# Altium PCB ESE516_BareBoardTemplate.PcbDoc (part 1 of 2)
Units mil, origin at the board's own origin, x right, y up, seen from the top; angles counter-clockwise.
Board outline 2362.21 x 2362.21 mil, 4 copper layers (Top Layer, GroundPlane, PowerPlane, Bottom Layer), stack 58.4 mil thick; 99 components, 72 nets, 333 pads, 111 vias.
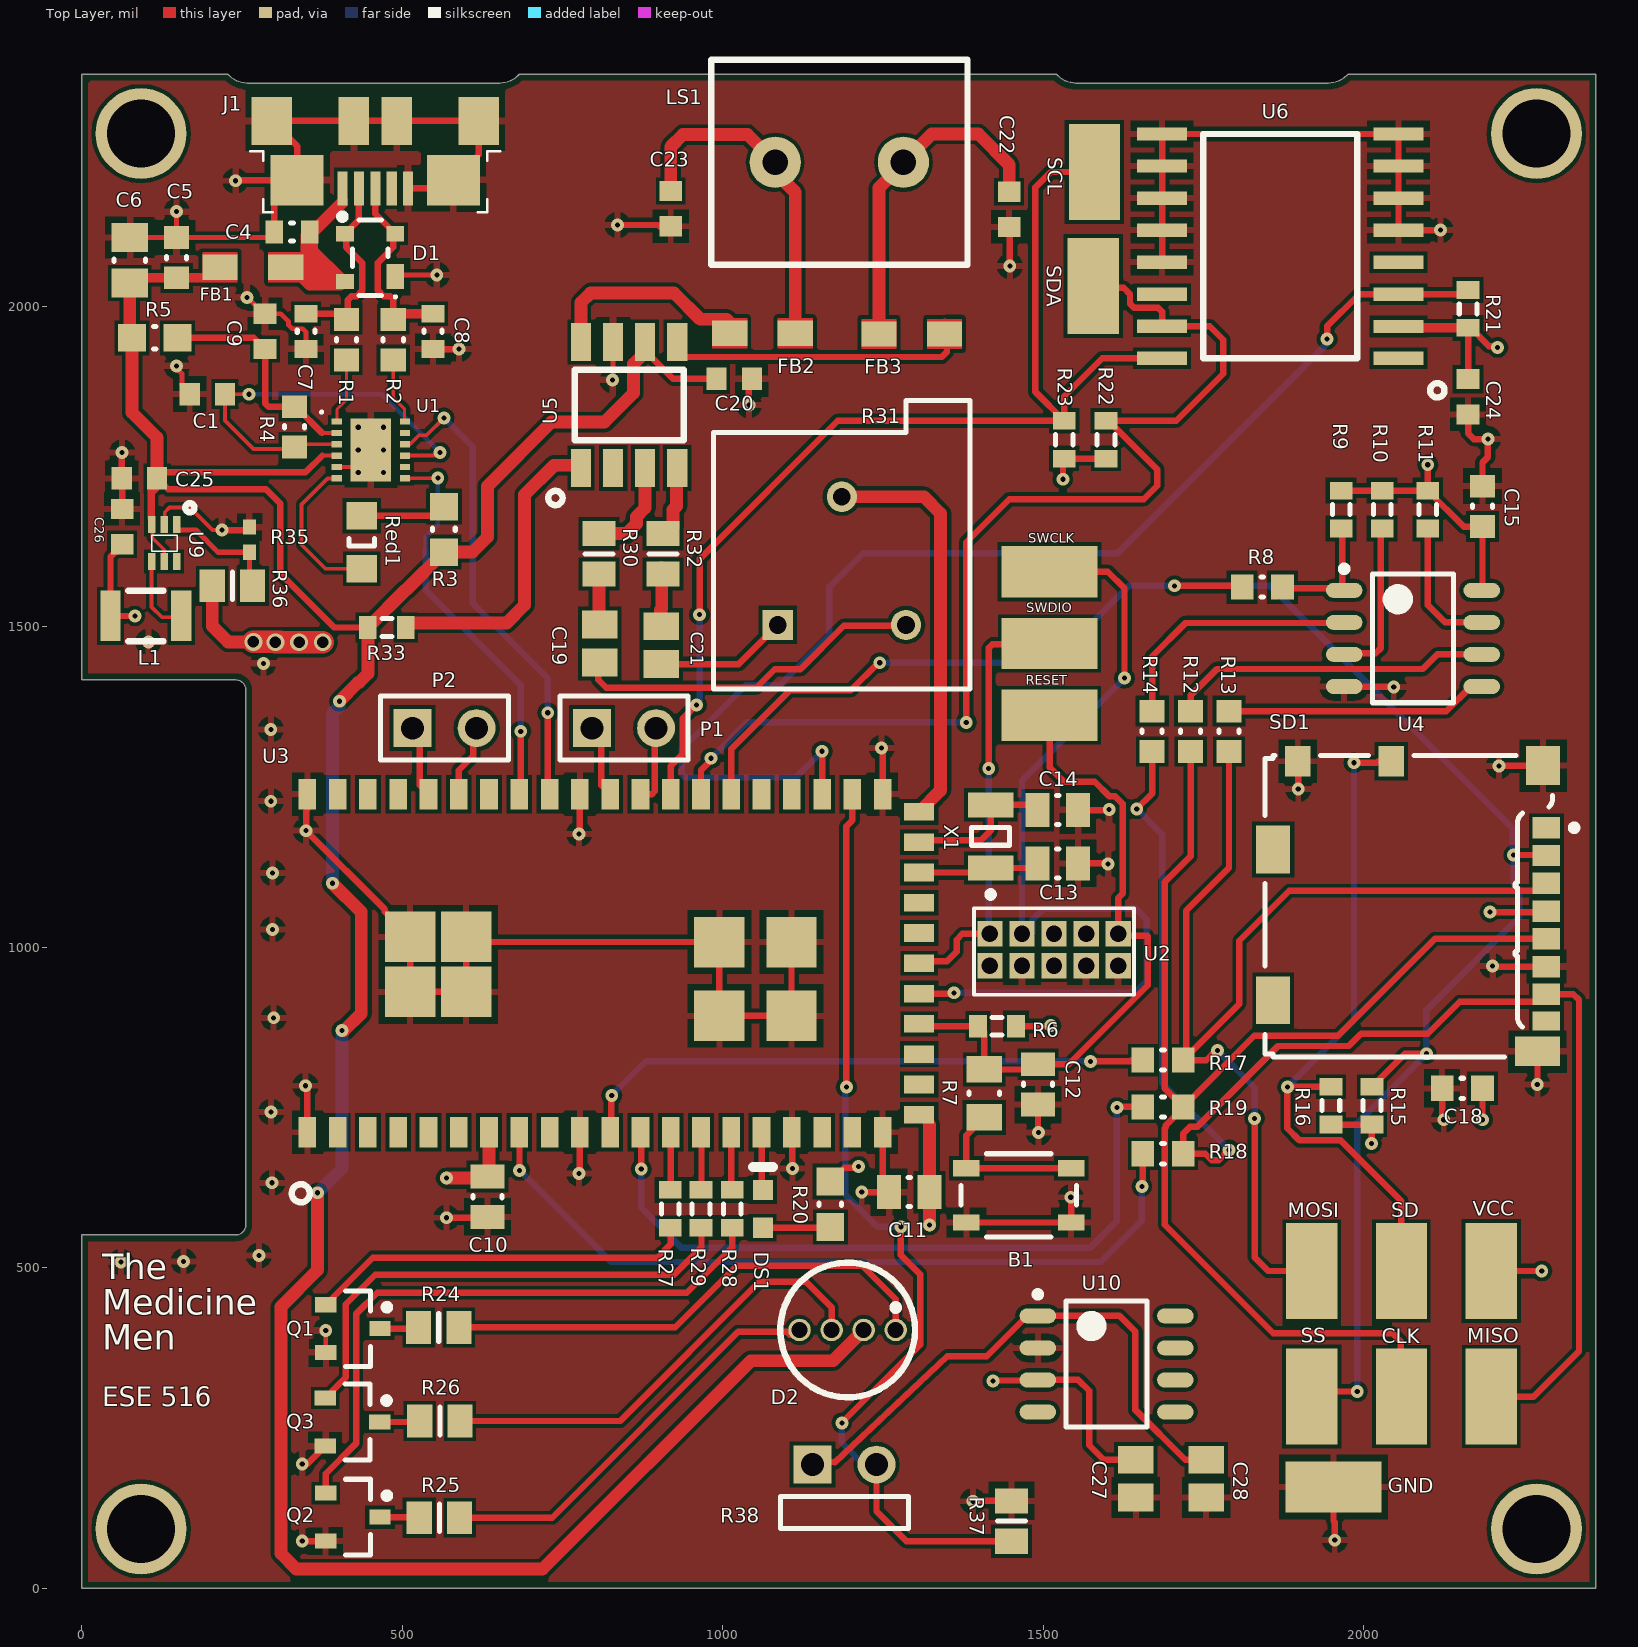
[diagram p0: Top Layer view]
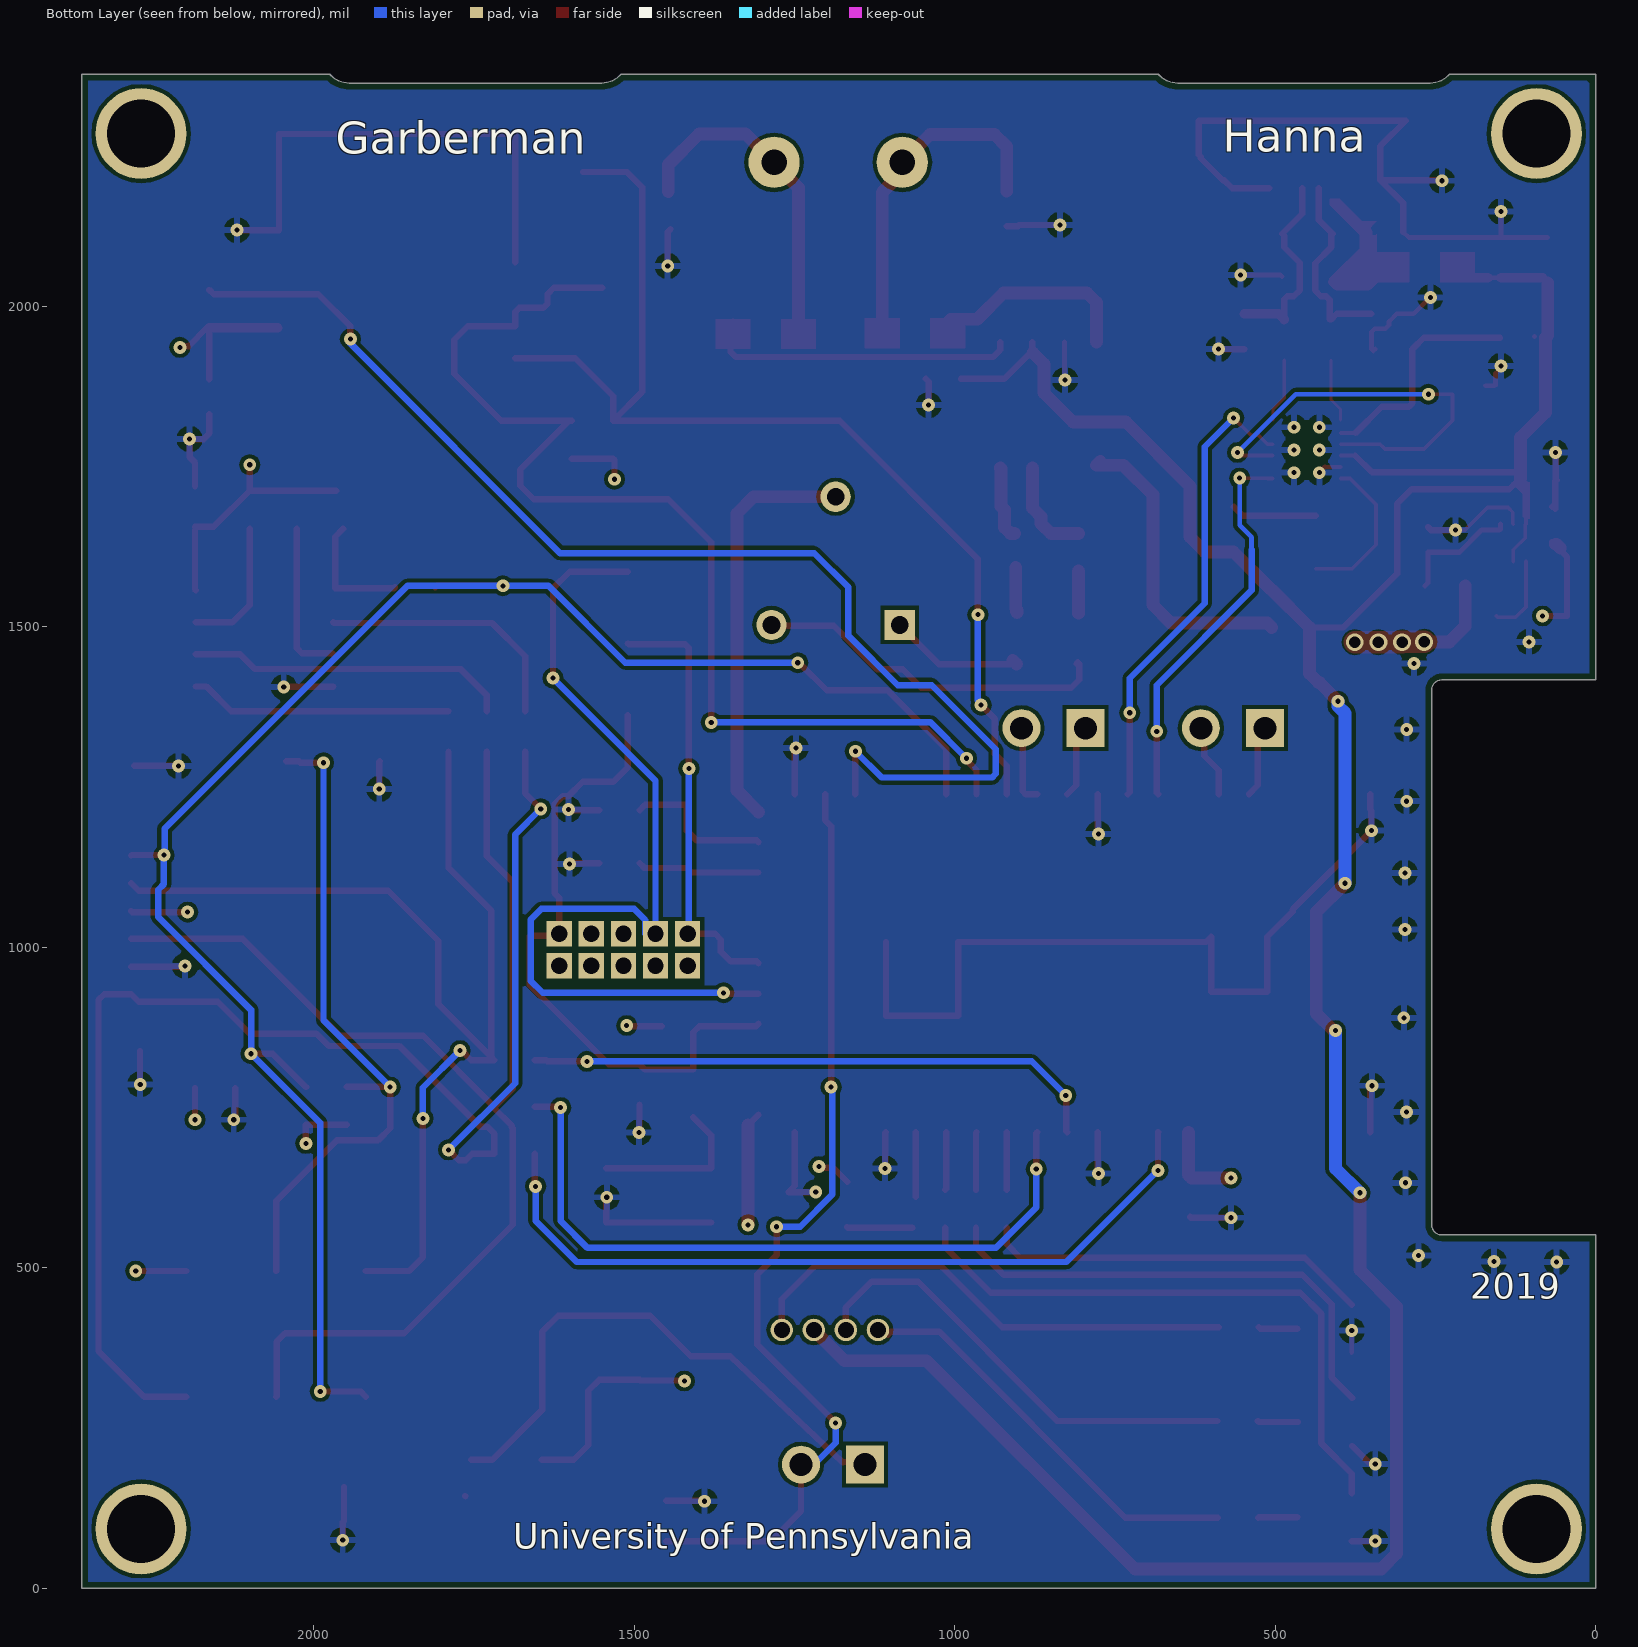
[diagram p1: Bottom Layer view, seen from below]
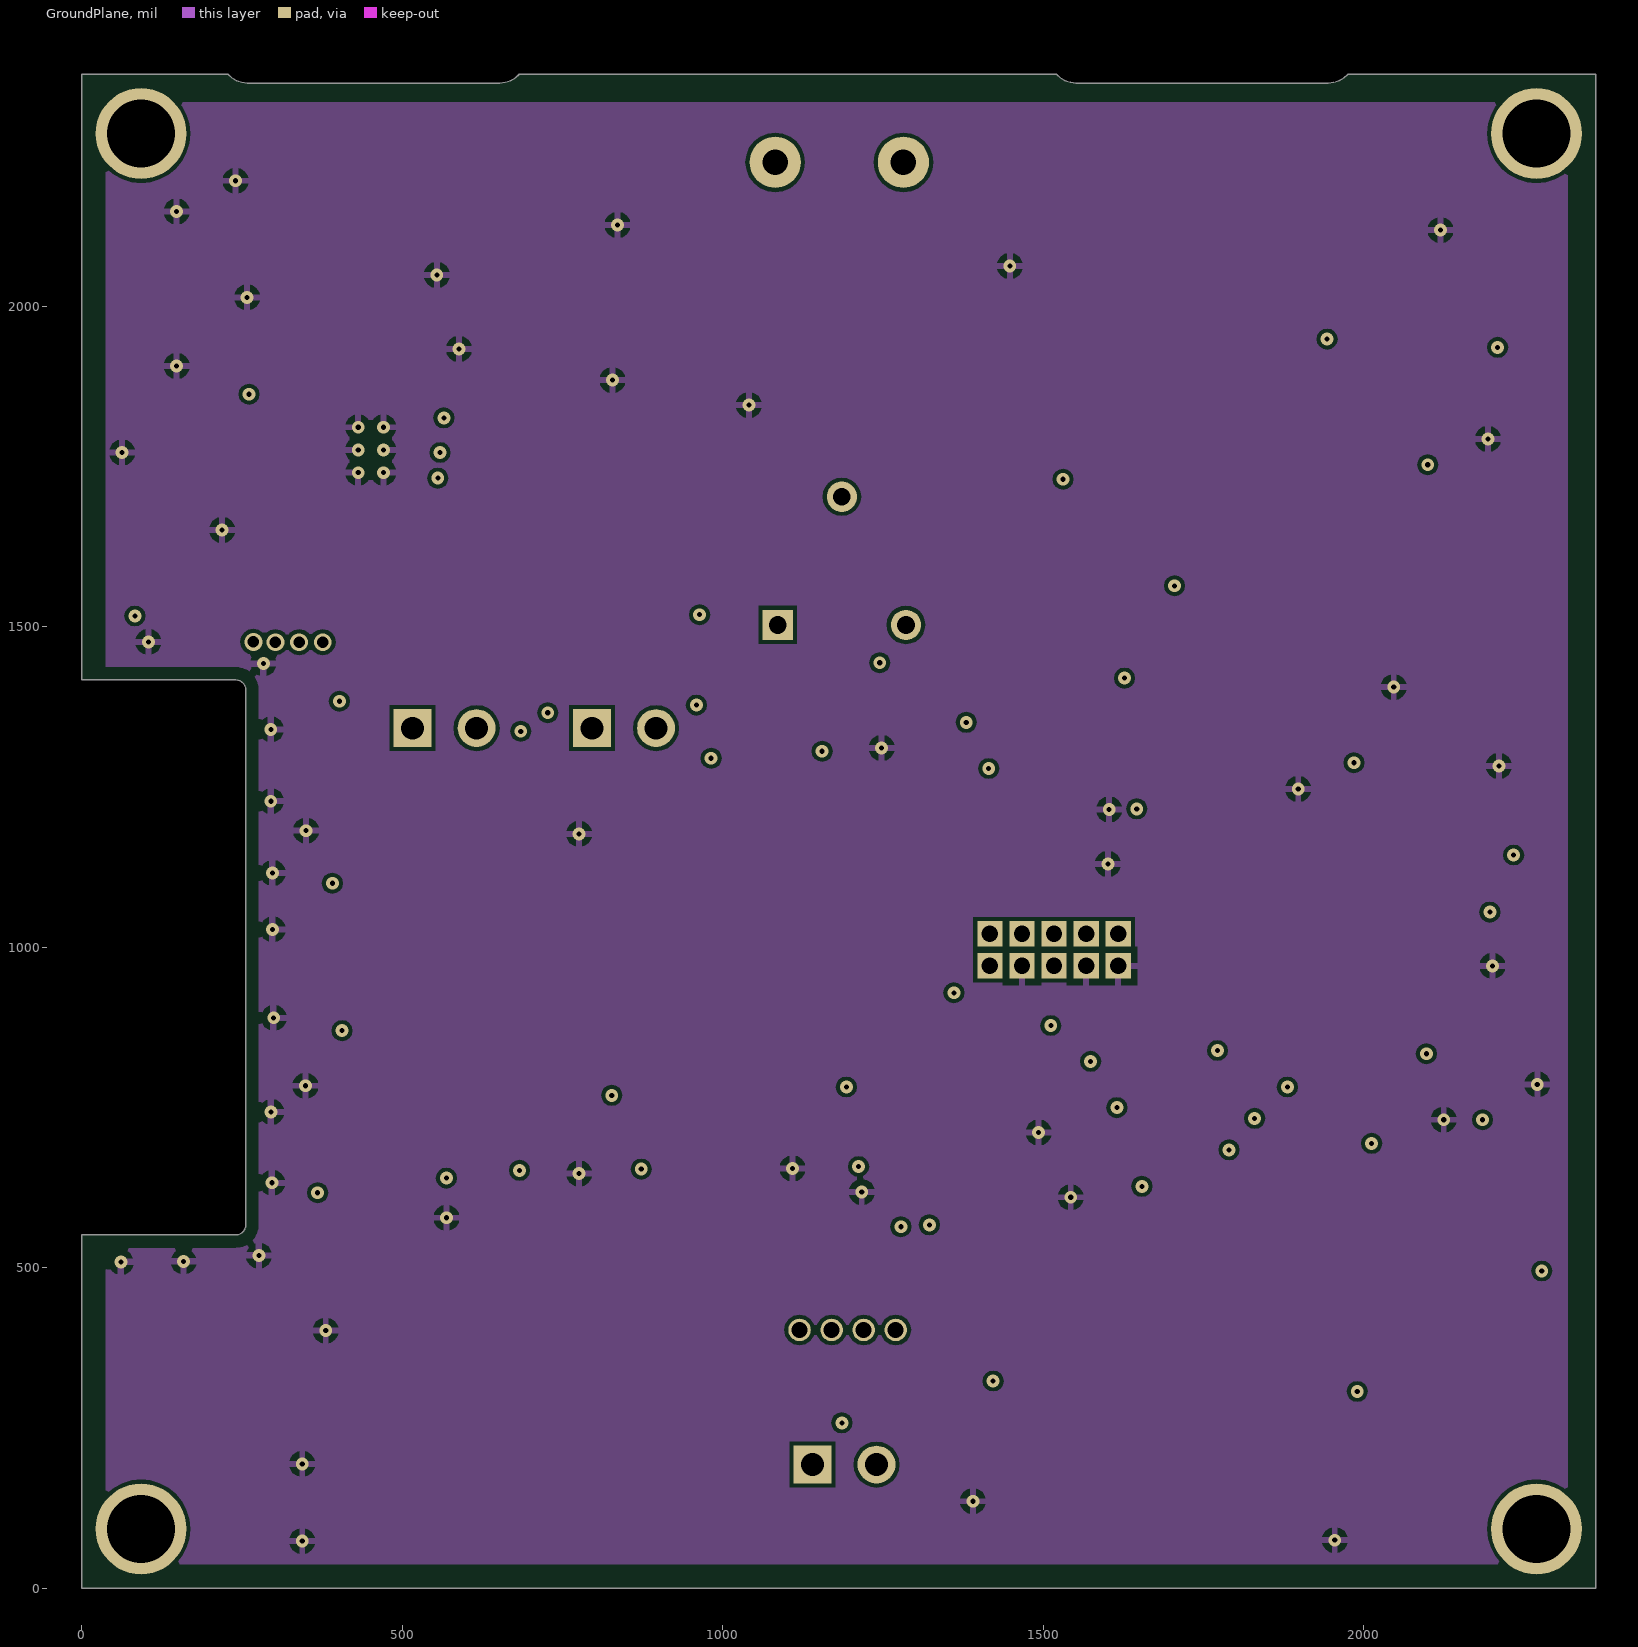
[diagram p2: GroundPlane]
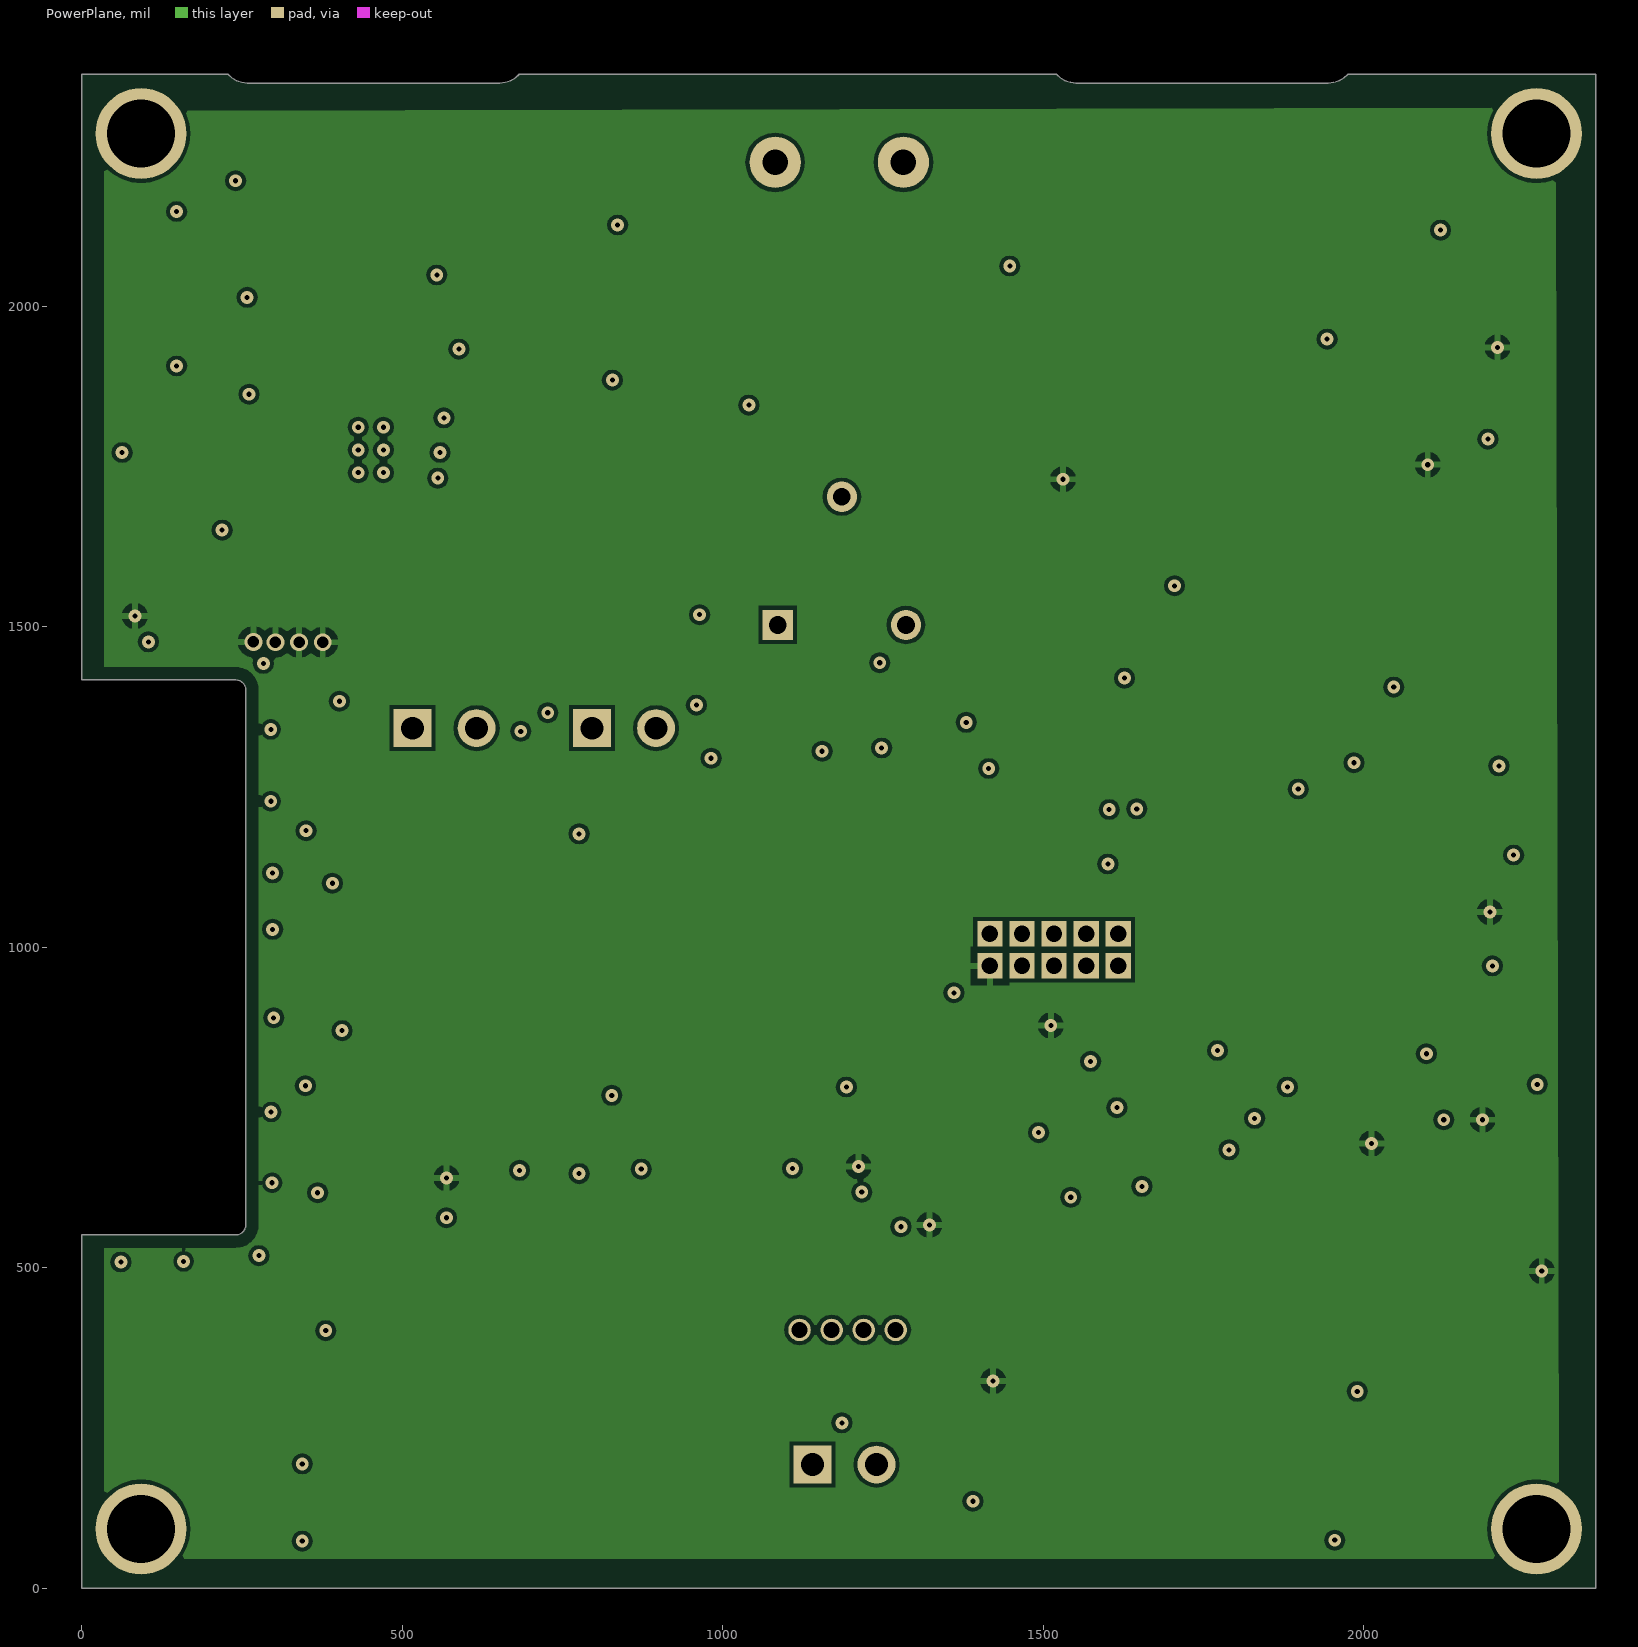
[diagram p3: PowerPlane]

## Layer stack, top to bottom
Top Solder: solder mask 1, Solder Resist, Dk 3.5
Top Layer: signal copper 1.5
Dielectric1: prepreg 13, PP-006, Dk 4.1
GroundPlane: signal copper 0.7
Dielectric 2: core 28, Core-009, Dk 4.5
PowerPlane: signal copper 0.7
Dielectric 3: prepreg 13, PP-006, Dk 4.1
Bottom Layer: signal copper 1.5
Bottom Solder: solder mask 1, Solder Resist, Dk 3.5

## Board outline
240.16,551.18 0,551.18 0,0 2362.21,0 2362.2,2362.2 1975.39,2362.2 1969.06,2356.37 1961.63,2352.01 1953.45,2349.32 1944.88,2348.42 1551.18,2348.42 1542.62,2349.33 1534.45,2352.01 1527.02,2356.35 1520.67,2362.16 682.72,2362.2 676.38,2356.37 668.95,2352.01 660.77,2349.32 652.2,2348.42 258.5,2348.42 249.95,2349.33 241.77,2352.01 234.34,2356.35 227.99,2362.16 0,2362.2 0,1417.32 240.16,1417.32 243.66,1416.93 246.99,1415.77 249.98,1413.89 252.48,1411.4 254.35,1408.41 255.51,1405.08 255.91,1401.57 255.91,566.93 255.51,563.42 254.35,560.09 252.48,557.1 249.98,554.61 246.99,552.73 243.66,551.57

## Design rules (kind name [scope] priority, off if disabled: settings)
AcuteAngle [All] p1: minimum=6.00000000000000E+0001 checktracksonly=FALSE
AssemblyTestPointUsage [All] p1 off: allowmultiple=TRUE
AssemblyTestpoint [All] p1 off: testpointundercomponent=TRUE minsize=30 maxsize=100 preferedsize=60 minholesize=0 maxholesize=40 preferedholesize=32 testpointgrid=1 usegrid=FALSE gridtolerance=0.01 allowsidebottom=TRUE
BoardOutlineClearance "BoardOutlineClearance_Inner Layer" [OnLayer('GroundPlane')OR OnLayer('PowerPlane')] p1: gap=20 ignorepadtopadclearanceinfootprint=FALSE
BoardOutlineClearance BoardOutlineClearance_OuterLayers [All] p2: gap=10 ignorepadtopadclearanceinfootprint=FALSE except(20: SMDPad-OutlineEdge SMDPad-CavityEdge SMDPad-CutoutEdge THPad-OutlineEdge THPad-CavityEdge THPad-CutoutEdge)
Clearance [All] p1: gap=6 ignorepadtopadclearanceinfootprint=FALSE except(10: SMDPad-THPad)
DiffPairsRouting [All] p1: maxlimit=10 minlimit=10 mostfreqgap=10 toplayer_minwidth=15 toplayer_maxwidth=15 toplayer_prefwidth=15 midlayer1_minwidth=15 midlayer1_maxwidth=15 midlayer1_prefwidth=15 midlayer2_minwidth=15 midlayer2_maxwidth=15 midlayer2_prefwidth=15 bottomlayer_minwidth=15 bottomlayer_maxwidth=15 bottomlayer_prefwidth=15 maxuncoupledlength=500
FabricationTestPointUsage [All] p1 off: valid=0 allowmultiple=TRUE
FabricationTestpoint [All] p1 off: side=2 testpointundercomponent=TRUE minsize=30 maxsize=100 preferedsize=60 minholesize=0 maxholesize=40 preferedholesize=32 testpointgrid=1 allowsidebottom=TRUE usegrid=FALSE gridtolerance=0.01
HoleSize [All] p1: absolutevalues=TRUE maxlimit=120 minlimit=8 maxpercent=80.000 minpercent=20.000
MinimumAnnularRing [All] p1: minimumring=5
MinimumSolderMaskSliver [All] p1: minsoldermaskwidth=4
PlaneClearance [All] p1: clearance=10
PolygonConnect [All] p1: connectstyle=Relief reliefconductorwidth=10 reliefentries=4 polygonreliefangle="90 Angle" airgapwidth=10
RoutingVias [All] p1: holewidth=8 width=20 viastyle="Through Hole" minholewidth=8 minwidth=20 maxholewidth=30 maxwidth=50
SMDNeckDown [All] p1: percent=75.000
SMDToCorner [All] p1: distance=0
SMDToPlane [All] p1: distance=0
SilkToSilkClearance [All] p1: silktosilkclearance=0
SilkToSolderMaskClearance [IsPad] p1: minsilkscreentomaskgap=2 clearancetoexposedcopper=TRUE
SolderMaskExpansion [All] p1: expansion=4
UnRoutedNet [All] p1: checkbadconnections=TRUE
ViasUnderSMD [All] p1: allowed=FALSE
Width [All] p1: maxlimit=1000 minlimit=6 preferedwidth=10
19 further rules are at their usual default settings.

## Classes and differential pairs
component class U_RTC: C24 R21 R22 R23 SCL SDA U6
component class U_Power_Converter: C25 C26 R35 R36 U9
component class U_Outputs: C19 C20 C21 C22 C23 D2 FB2 FB3 LS1 Q1 Q2 Q3 R24 R25 R26 R27 R28 R29 R30 R31 R32 R33 U5
component class "U_FTDI (2)": C1 C4 C5 C6 C7 C8 C9 D1 FB1 J1 R1 R2 R3 R4 R5 Red1 U1
component class U_FSR: C27 C28 R37 R38 U10
component class U_Memory: C15 C18 CLK GND MISO MOSI R8 R9 R10 R11 R12 R13 R14 R15 R16 SD SD1 SS U4 VCC
component class U_MCU: B1 C10 C11 C12 C13 C14 P1 P2 R6 R7 RESET SWCLK SWDIO U2 U3 X1
component class MAIN: DS1 R17 R18 R19 R20
differential pair USB_FTDI_DATA: +USB_FTDI_DATA_P -USB_FTDI_DATA_N
differential pair USB_DATA: +USB_DATA_P -USB_DATA_N

## Components (designator, comment, footprint, x,y, rotation, side; value= is the part's Value field where it differs from the comment)
B1 "PTS810 SJK 250 SMTR LFS" "PTS810 SJK 250 SMTR LFS" 1462,613 r0 top
C1 "Cap" 1608[0603] 196,1863 r0 top value=100nF
C4 "10nF 16V" CAPC0603(1608)100_L 328,2116 r0 top value=10nF
C5 "100nF 16V" CAPC0603(1608)100_N 148,2076 r270 top value=100nF
C6 "4.7uF 16V" CAPC0805(2012)145_N 75,2072 r270 top value=4.7uF
C7 "47pF 16V" CAPC0603(1608)100_L 350,1961 r90 top value=47pF
C8 "47pF 16V" CAPC0603(1608)100_L 548,1961 r90 top value=47pF
C9 "Cap" 1608[0603] 286,1961 r270 top value=100nF
C10 "CAP 10uF 16V" CAPC0805(2012)145_L 633,611 r90 top value=10uF
C11 "CAP 10uF 16V" CAPC0805(2012)145_L 1291,618 r0 top value=10uF
C12 "CAP 10uF 16V" CAPC0805(2012)145_L 1492,786.09 r90 top value=10uF
C13 "CAP 18pF 10V" CAPC0805(2012)75_L 1523,1131 r0 top value=18pF
C14 "CAP 18pF 10V" CAPC0805(2012)75_L 1523,1214 r0 top value=18pF
C15 "CAP 1uF 16V" CAPC0603(1608)100_N 2185.5,1688 r270 top value=1uF
C18 "100nF 16V" CAPC0603(1608)100_N 2154,780 r0 top value=100nF
C19 "Cap" C0805#1 808,1474 r90 top value=1uF
C20 "Cap" 1608[0603] 1018,1887 r0 top value=10uF
C21 "Cap" C0805#2 904,1471.47 r90 top value=1uF
C22 "Cap" 1608[0603] 1447,2151.44 r270 top value=220pF
C23 "Cap" 1608[0603] 919,2152.56 r90 top value=220pF
C24 "Cap" 1608[0603] 2163,1859 r270 top value="0.1 uF"
C25 "Cap" 1608[0603] 90,1731.71 r0 top value=4.7uF
C26 "Cap" 1608[0603] 63,1656.44 r270 top value=22uF
C27 "Cap" C0805#2 1644.56,171 r90 top value=100u
C28 "Cap" C0805#2 1754.29,171 r90 top value=1u
CLK "5019" KSTN-5019_V#1 2059,302 r90 top (schematic designator TP5)
D1 "PRTR5V0U2X,215" NXP-SOT143B-4_V 450,2076 r180 top
D2 "RGB LED" "WP154A4 LED" 1195,403 r270 top
DS1 "LTST-C191KGKT" LITE-ON-LTST-C191KRKT-2_V 1063,592 r90 top
FB1 "BLM21PG221SN1D" MURA-BLM21-B20-CHIP-2_V1#1 267,2060.93 r180 top
FB2 "BLM21PG221SN1D" MURA-BLM21-B20-CHIP-2_V1#2 1062,1958.1 r0 top
FB3 "BLM21PG221SN1D" MURA-BLM21-B20-CHIP-2_V1#2 1295,1957 r180 top
GND "5019" KSTN-5019_V#2 1953,158 r0 top (schematic designator TP15)
J1 "ZX62R-B-5P" HIRO-ZX62R-B-5P_V 458.05,2236.86 r180 top
L1 "Inductor" DFE252012F 100,1517 r180 top value=1uH
LS1 "Speaker" Speaker 1182,2224.82 r270 top
MISO "5019" KSTN-5019_V#2 2199,299 r90 top (schematic designator TP4)
MOSI "5019" KSTN-5019_V#2 1919,495 r90 top (schematic designator TP3)
P1 "Header 2" HDR1X2 796,1342 r0 top
P2 "Header 2" HDR1X2 516,1342 r0 top
Q1 "NPN" SOT23_L 423,405 r0 top
Q2 "NPN" SOT23_L 423,111 r0 top
Q3 "NPN" SOT23_L 422.32,259.4 r0 top
R1 "27R 1%" RESC0603(1608)_N 413,1948 r270 top value="27.00 Ohm"
R2 "27R 1%" RESC0603(1608)_N 486,1948 r270 top value="27.00 Ohm"
R3 "1K" RESC0603(1608)_M 565,1652 r270 top value="1000.00 Ohm"
R4 "Jumper" RESC0603(1608)_N 332,1812 r90 top value="0.00 Ohm"
R5 "1K" RESC0603(1608)_M 114,1951 r0 top value="1000.00 Ohm"
R6 "" J1-0603 1428,877 r0 top value=10K
R7 "39R" RESC0805(2012)_N 1408,772 r270 top value="39.00 Ohm"
R8 "Jumper" RESC0603(1608)_N 1842,1562 r0 top value="0.00 Ohm"
R9 "" J1-0603 1965,1683 r90 top value=10K
R10 "" J1-0603 2029,1683 r90 top value=10K
R11 "" J1-0603 2100,1683 r90 top value=10K
R12 "Jumper" RESC0603(1608)_N 1730,1337 r90 top value="0.00 Ohm"
R13 "Jumper" RESC0603(1608)_N 1790,1337 r90 top value="0.00 Ohm"
R14 "Jumper" RESC0603(1608)_N 1670,1337 r90 top value="0.00 Ohm"
R15 "10K" J1-0603 2013,753 r270 top
R16 "10K" J1-0603 1949,753 r270 top
R17 "27R 1%" RESC0603(1608)_N 1687,824 r0 top value="27.00 Ohm"
R18 "27R 1%" RESC0603(1608)_N 1687,678 r0 top value="27.00 Ohm"
R19 "27R 1%" RESC0603(1608)_N 1687,751 r0 top value="27.00 Ohm"
R20 "1K" RESC0603(1608)_M 1168,599 r270 top value="1000.00 Ohm"
R21 "Res1" J1-0603 2163,1996 r270 top value=1K
R22 "Res1" J1-0603 1598,1792 r270 top value=1K
R23 "Res1" J1-0603 1533,1792 r270 top value=1K
R24 "Res1" 6-0805_L 557,407 r0 top value=220
R25 "Res1" 6-0805_L 558,110 r0 top value=220
R26 "Res1" 6-0805_L 558.69,261 r0 top value=220
R27 "Res1" J1-0603 918,592 r270 top value=1K
R28 "Res1" J1-0603 1015,592 r270 top value=1K
R29 "Res1" J1-0603 966.17,592 r270 top value=1K
R30 "100" 6-0805_L 807,1614 r90 top value=100R
R31 "RPot" VR4 1186,1653 r0 top value=10K
R32 "100" 6-0805_L 907,1614 r90 top value=100R
R33 "" J1-0603 476,1499 r180 top value=10K
R35 "Res1" 0402 261.72,1636 r270 top value=100K
R36 "Res1" 6-0805_L 235,1564 r180 top value=453K
R37 "30k" 6-0805_L 1450.41,104.81 r90 top value=1K
R38 "FSR" HDR1X2H 1140,193 r0 top
Red1 "150080SS75000" 0805_A 437,1632 r90 top
RESET "5019" KSTN-5019_V#3 1512,1357 r0 top (schematic designator TP11)
SCL "5019" KSTN-5019_V#2 1580,2209.72 r90 top (schematic designator TP14)
SD "5019" KSTN-5019_V#4 2059,493 r90 top (schematic designator TP2)
SD1 "104031-0811" MOLX-104031-0811_V 2072,1064 r90 top
SDA "5019" KSTN-5019_V#2 1578,2032 r90 top (schematic designator TP13)
SS "5019" KSTN-5019_V#5 1917,299 r90 top (schematic designator TP6)
SWCLK "5019" KSTN-5019_V#2 1510,1586 r0 top (schematic designator TP9)
SWDIO "5019" KSTN-5019_V#1 1513,1474 r0 top (schematic designator TP10)
U1 "FT234XD-R" DFN-12_V 451,1776 r0 top
U2 "20021111-00010T4LF" 20021111-00010T4LF 1517,1021 r0 top
U3 "SAMW25H18-MR510PB" SAMW25H18-MR510PB 829.19,975.22 r180 top
U4 "AT25DF081A-SSH-T" AT25DF081A-SSH-T 2077,1482 r0 top
U5 "Class D Amp" "PAM8302 SO-8" 854,1846 r0 top
U6 "Real-Time Clock" "DS3231 SO16" 1870,2094 r180 top
U9 "TLV62568DRL" TLV62568-SOT563 128.68,1630.87 r270 top
U10 "TLE2426CDR" TLE2426CDR 1599,350 r0 top
VCC "5019" KSTN-5019_V#2 2199,495 r90 top (schematic designator TP1)
X1 "14340272-32.768KHz" ITTI-14340272-32.768KHz-2_V 1418,1173 r90 top

## Footprints (in the part's own frame and the unit in brackets; to place one, negate y for a bottom-side part, rotate by r counter-clockwise, add the part's x,y. Pads: shape width x height; smd on the part's side, far side on the other; paste and mask are expansions set on the pad)
6-0805_L [mm] "Chip Resistor, Body 2.0x1.2mm, IPC High Density"
  rect 1x1.3 smd: 1(-0.8,0) 2(0.8,0)
  silkscreen extent 0,-0.55 0,0.55, body extent -1.07,-0.7 1.07,0.7, height 0.7
0402 [mm] "Chip Capacitor, Body 1.0x0.5mm, IPC High Density"
  rect 0.6x0.5 smd: 1(-0.5,0) 2(0.5,0)
  body extent -0.55,-0.3 0.55,0.3, height 1.3
0805_A [mm] "Chip LED, 2-Leads, Body 2.0x1.3mm, IPC Medium Density"
  rect 1.1x1.2 smd: 1(-1.05,0) 2(1.05,0)
  silkscreen extent -0.15,-0.5 0.15,0.5, body extent -1,-0.62 1,0.63, height 0.68
1608[0603] [mm] "Chip Capacitor, Body 1.6x0.8mm, IPC High Density"
  rect 0.8x0.9 smd: 1(-0.7,0) 2(0.7,0)
  body extent -0.87,-0.48 0.87,0.48, height 1.3
20021111-00010T4LF [mil] "CONN HEADER 10POS UNSHD VERT T/H"
  rect 39.6x39.6 hole 25.6 mask+6: 1(-100,-50) 2(-100,0) 3(-50,-50) 4(-50,0) 5(0,-50) 6(0,0) 7(50,-50) 8(50,0) 9(100,-50) 10(100,0)
  silkscreen extent -125,-95 125,40, body extent -125,-92 125,42, height 217
AT25DF081A-SSH-T [mm] "IC FLASH 8MBIT 100MHZ 8SOIC"
  oval 1.45x0.6 smd: 1(-2.725,1.905) 2(-2.725,0.635) 3(-2.725,-0.635) 4(-2.725,-1.905) 5(2.725,-1.905) 6(2.725,-0.635) 7(2.725,0.635) 8(2.725,1.905)
  silkscreen extent -2.85,-2.55 1.6,2.88, body extent -3,-2.55 3,2.55, height 1.75
C0805#1 [mm] "Chip Capacitor, Body 2.0x1.3mm, IPC High Density"
  rect 1.1x1.4 smd mask+0.381: 1(-0.75,0) 2(0.75,0)
  body extent -1.1,-0.72 1.1,0.72, height 1.4
C0805#2 [mm] "Chip Capacitor, Body 2.0x1.3mm, IPC High Density"
  rect 1.1x1.4 smd: 1(-0.75,0) 2(0.75,0)
  body extent -1.1,-0.72 1.1,0.72, height 1.4
CAPC0603(1608)100_L [mm] "Chip Capacitor, Body 1.6x0.8mm, Height 1.0mm, IPC High Density"
  rect 0.7x0.9 smd: 1(-0.7,0) 2(0.7,0)
  silkscreen extent -0.05,-0.35 0.05,0.35, body extent -0.87,-0.47 0.88,0.48, height 1
CAPC0603(1608)100_N [mm] "Chip Capacitor, Body 1.6x0.8mm, Height 1.0mm, IPC Medium Density"
  rect 0.9x1 smd: 1(-0.8,0) 2(0.8,0)
  silkscreen extent -0.05,-0.4 0.05,0.4, body extent -0.87,-0.48 0.88,0.47, height 1
CAPC0805(2012)75_L [mm] "Chip Capacitor, Body 2.0x1.2mm, Height 0.75mm, IPC High Density"
  rect 0.95x1.35 smd: 1(-0.8,0) 2(0.8,0)
  silkscreen extent -0.05,-0.58 0.05,0.58, body extent -1.1,-0.72 1.1,0.72, height 0.75
CAPC0805(2012)145_L [mm] "Chip Capacitor, Body 2.0x1.2mm, Height 1.45mm, IPC High Density"
  rect 0.95x1.35 smd: 1(-0.8,0) 2(0.8,0)
  silkscreen extent -0.05,-0.58 0.05,0.58, body extent -1.1,-0.72 1.1,0.72, height 1.45
CAPC0805(2012)145_N [mm] "Chip Capacitor, Body 2.0x1.2mm, Height 1.45mm, IPC Medium Density"
  rect 1.15x1.45 smd: 1(-0.9,0) 2(0.9,0)
  silkscreen extent -0.05,-0.62 0.05,0.63, body extent -1.1,-0.72 1.1,0.73, height 1.45
DFE252012F [mm] "Power Inductor 1008"
  rect 0.8x2 smd: 1(-1.4,0) 2(1.4,0)
  silkscreen extent -0.7,-1 0.7,1
DFN-12_V [mm] "SON, 12-Leads, Body 3x3mm, Pitch 0.45mm, Thermal Pad 2.5x1.6mm"
  rect 0.4x0.25 smd mask+0.127: 1(-1.35,1.125) 2(-1.35,0.675) 3(-1.35,0.225) 4(-1.35,-0.225) 5(-1.35,-0.675) 6(-1.35,-1.125) 7(1.35,-1.125) 8(1.35,-0.675) 9(1.35,-0.225) 10(1.35,0.225) 11(1.35,0.675) 12(1.35,1.125)
  rect 1.6x2.5 smd mask+0.102: 13(0,0)
  silkscreen extent -2,1.45 -1.9,1.55, body extent -1.5,-1.5 1.5,1.5, height 0.9
"DS3231 SO16" [mm]
  rect 1.98x0.53 smd: 1(-4.685,4.445) 2(-4.685,3.185) 3(-4.685,1.905) 4(-4.685,0.635) 5(-4.685,-0.635) 6(-4.685,-1.905) 7(-4.685,-3.175) 8(-4.685,-4.445) 9(4.685,-4.445) 10(4.685,-3.175) 11(4.685,-1.905) 12(4.685,-0.635) 13(4.685,0.635) 14(4.685,1.905) 15(4.685,3.175) 16(4.685,4.445)
  Top Layer region: -1.27,8.255
  Top Layer region: -1.27,1.016
  silkscreen extent -6.51,-4.45 3.05,6
HDR1X2 [mm] "Connector; Header; 2 Position"
  rect 1.5x1.5 hole 0.9: 1(0,0)
  round 1.5 hole 0.9: 2(2.54,0)
  silkscreen extent -1.27,-1.27 3.81,1.27
HDR1X2H [mm] "Connector; Header; 2 Position; Right Angle"
  rect 1.5x1.5 hole 0.9: 1(0,0)
  round 1.5 hole 0.9: 2(2.54,0)
  silkscreen extent -1.27,-2.54 3.81,-1.27
HIRO-ZX62R-B-5P_V [mm] "USB Micro-B R/A Connector"
  rect 0.4x1.35 smd: 1(1.3,1.338) 2(0.65,1.338) 3(0,1.338) 4(-0.65,1.338) 5(-1.3,1.338)
  rect 2.1x2 smd: 6(-3.1,1.012) 11(3.1,1.012)
  rect 1.6x1.9 smd: 7(-4.1,-1.338) 10(4.1,-1.338)
  rect 1.2x1.9 smd: 8(-0.85,-1.338) 9(0.85,-1.338)
  silkscreen extent -4.95,-0.13 4.95,2.58, body extent -4.4,-3.95 4.4,1.78, height 2.71
ITTI-14340272-32.768KHz-2_V [mm] "Hand Drawn, 2-Leads, Body 3.2x1.5mm, Pitch 2.5mm"
  rect 1x1.8 smd: 1(-1.25,0) 2(1.25,0)
  silkscreen extent -2.43,-0.75 0.35,0.75, body extent -1.6,-0.75 1.6,0.75, height 0.9
J1-0603 [mm] "Chip Resistor, Body 1.6x0.8mm, IPC High Density"
  rect 0.7x0.9 smd: 1(-0.75,0) 2(0.75,0)
  silkscreen extent -0.2,-0.35 0.2,0.35, body extent -0.85,-0.48 0.85,0.48, height 0.9
KSTN-5019_V#1 [mm] "Test Point, 1-Leads, Body 3.81x2.03mm"
  rect 3.8x2.03 smd: 1(-0.076,0)
  body extent -1.9,-1.01 1.9,1.02, height 2.29
KSTN-5019_V#2 [mm] "Test Point, 1-Leads, Body 3.81x2.03mm"
  rect 3.8x2.03 smd: 1(0,0)
  body extent -1.9,-1.01 1.9,1.02, height 2.29
KSTN-5019_V#3 [mm] "Test Point, 1-Leads, Body 3.81x2.03mm"
  rect 3.8x2.03 smd: 1(-0.051,0.127)
  body extent -1.9,-1.01 1.9,1.02, height 2.29
KSTN-5019_V#4 [mm] "Test Point, 1-Leads, Body 3.81x2.03mm"
  rect 3.8x2.03 smd: 1(0.051,0)
  body extent -1.9,-1.01 1.9,1.02, height 2.29
KSTN-5019_V#5 [mm] "Test Point, 1-Leads, Body 3.81x2.03mm"
  rect 3.8x2.03 smd: 1(0,-0.051)
  body extent -1.9,-1.01 1.9,1.02, height 2.29
LITE-ON-LTST-C191KRKT-2_V [mm] "Chip, 2-Leads, Body 1.6x0.8mm"
  rect 0.8x0.8 smd: 1(-0.75,0) 2(0.75,0)
  silkscreen extent 1.65,-0.4 1.65,0.4, body extent -0.8,-0.4 0.8,0.4, height 0.55
MOLX-104031-0811_V [mm] "Micro SD, 8-Leads, Body 11.95x11.4mm, Pitch 1.1mm"
  rect 0.85x1.1 smd mask+0.142: 1(3.113,-5.412) 2(2.013,-5.412) 3(0.913,-5.412) 4(-0.188,-5.412) 5(-1.288,-5.412) 6(-2.387,-5.412) 7(-3.487,-5.412)
  rect 0.75x1.1 smd mask+0.142: 8(-4.537,-5.412)
  rect 1.2x1 smd: 9(5.748,0.738) 10(5.748,4.438)
  rect 1.55x1.35 smd: 11(5.573,-5.287)
  rect 1.17x1.8 smd mask+0.142: 12(-5.747,-5.062)
  rect 1.9x1.35 smd: 13(-3.722,5.413) 14(2.248,5.413)
  silkscreen extent -5.97,-6.64 5.98,5.74, body extent -5.97,-5.66 5.98,5.74, height 1.45
MURA-BLM21-B20-CHIP-2_V1#1 [mm] "Chip Ferrite Bead, 2-Leads, Body 2x1.25mm, Height 1.05mm, 18um Land Pad Thickness, 2A Rated Current"
  rect 1.4x1 smd mask+0.203: 1(-1.3,0)
  rect 1.4x1 smd mask+0: 2(1.3,0)
  Top Layer region: 0.6,-0.6 2,-0.6 2,0.6 0.6,0.6
  Top Layer region: -2,-0.6 -0.6,-0.6 -0.6,0.6 -2,0.6
  body extent -1,-0.63 1,0.63, height 1.05
MURA-BLM21-B20-CHIP-2_V1#2 [mm] "Chip Ferrite Bead, 2-Leads, Body 2x1.25mm, Height 1.05mm, 18um Land Pad Thickness, 2A Rated Current"
  rect 1.4x1 smd mask+0: 1(-1.3,0) 2(1.3,0)
  Top Layer region: -2,-0.6 -0.6,-0.6 -0.6,0.6 -2,0.6
  Top Layer region: 0.6,-0.6 2,-0.6 2,0.6 0.6,0.6
  body extent -1,-0.63 1,0.63, height 1.05
NXP-SOT143B-4_V [mm] "SOT143, 4-Leads, Body 3x1.4mm"
  rect 0.7x1 smd: 1(-1,0.75)
  rect 0.7x0.6 smd: 2(-1,-0.95) 3(1,-0.95) 4(1,0.95)
  silkscreen extent -1.05,-1.5 0.7,1.6, body extent -0.7,-1.5 0.7,1.5, height 1.1
"PAM8302 SO-8" [mm]
  rect 0.802x1.505 smd: 1(-1.905,-2.498) 2(-0.635,-2.498) 3(0.635,-2.498) 4(1.905,-2.498) 5(1.905,2.498) 6(0.635,2.498) 7(-0.635,2.498) 8(-1.905,2.498)
  silkscreen extent -3.2,-3.97 2.16,1.4
"PTS810 SJK 250 SMTR LFS" [mm] "SWITCH TACTILE SPST-NO 0.05A 16V"
  rect 1.05x0.65 smd: 1(-2.075,1.075) 2(2.075,1.075) 3(-2.075,-1.075) 4(2.075,-1.075)
  silkscreen extent -2.29,-1.65 2.29,1.65, body extent -2.3,-1.6 2.3,1.6, height 2.5
RESC0603(1608)_M [mm] "Chip Resistor, Body 1.6x0.8mm, IPC Low Density"
  rect 1.1x1.1 smd: 1(-0.9,0) 2(0.9,0)
  silkscreen extent -0.05,-0.45 0.05,0.45, body extent -0.85,-0.47 0.85,0.47, height 0.6
RESC0603(1608)_N [mm] "Chip Resistor, Body 1.6x0.8mm, IPC Medium Density"
  rect 0.9x1 smd: 1(-0.8,0) 2(0.8,0)
  silkscreen extent -0.05,-0.4 0.05,0.4, body extent -0.85,-0.47 0.85,0.47, height 0.6
RESC0805(2012)_N [mm] "Chip Resistor, Body 2.0x1.3mm, IPC Medium Density"
  rect 1.05x1.4 smd: 1(-0.95,0) 2(0.95,0)
  silkscreen extent -0.05,-0.6 0.05,0.6, body extent -1.1,-0.67 1.1,0.68, height 0.7
SAMW25H18-MR510PB [mm] "RF TXRX MODULE WIFI TRACE ANT"
  rect 2x2 smd: 0(-7.065,-0.839) 0(-7.065,2.085) 0(-4.21,-0.839) 0(-4.21,2.085) 0(5.828,-1.045) 0(5.828,1.137) 0(8.046,-1.045) 0(8.046,1.137)
  rect 0.7x1.2 smd: 1(12.121,6.7) 2(10.921,6.7) 3(9.721,6.7) 4(8.521,6.7) 5(7.321,6.7) 6(6.121,6.7) 7(4.921,6.7) 8(3.721,6.7) 9(2.521,6.7) 10(1.321,6.7) 11(0.121,6.7) 12(-1.079,6.7) 13(-2.279,6.7) 14(-3.479,6.7) 15(-4.679,6.7) 16(-5.879,6.7) 17(-7.079,6.7) 18(-8.279,6.7) 19(-9.479,6.7) 20(-10.679,6.7) 32(-10.679,-6.7) 33(-9.479,-6.7) 34(-8.279,-6.7) 35(-7.079,-6.7) 36(-5.879,-6.7) 37(-4.679,-6.7) 38(-3.479,-6.7) 39(-2.279,-6.7) 40(-1.079,-6.7) 41(0.121,-6.7) 42(1.321,-6.7) 43(2.521,-6.7) 44(3.721,-6.7) 45(4.921,-6.7) 46(6.121,-6.7) 47(7.321,-6.7) 48(8.521,-6.7) 49(9.721,-6.7) 50(10.921,-6.7) 51(12.121,-6.7)
  rect 1.2x0.7 smd: 21(-12.12,6.004) 22(-12.12,4.804) 23(-12.12,3.604) 24(-12.12,2.404) 25(-12.12,1.204) 26(-12.12,0.004) 27(-12.12,-1.196) 28(-12.12,-2.396) 29(-12.12,-3.596) 30(-12.12,-4.796) 31(-12.12,-5.996)
  silkscreen extent 12.02,8.76 12.74,9.48, body extent -12.89,-7.45 20.98,7.46, height 3.37
SOT23_L [mm] "SOT23, 3-Leads, Body 2.9x1.3mm, Pitch 0.95mm, Lead Span 2.3mm - Reverse Pinning, IPC High Density"
  rect 0.85x0.6 smd: 1(1.075,0) 2(-1.075,-0.95) 3(-1.075,0.95)
  silkscreen extent -0.3,-1.5 1.48,1.5, body extent -0.7,-1.5 0.7,1.5, height 1.1
Speaker [mil] "Screw terminal for 2 terminal speaker"
  round 80 hole 40: 1(0,100) 2(0,-100)
  silkscreen extent -160,-200 160,200
TLE2426CDR [mm] "SOIC, 8-Leads, Body 4.91x3.90mm, Pitch 1.27mm, IPC Medium Density"
  oval 1.45x0.6 smd: 1(-2.725,1.905) 2(-2.725,0.635) 3(-2.725,-0.635) 4(-2.725,-1.905) 5(2.725,-1.905) 6(2.725,-0.635) 7(2.725,0.635) 8(2.725,1.905)
  silkscreen extent -2.85,-2.5 1.6,2.88, body extent -2,-2.5 2,2.5, height 1.75
TLV62568-SOT563 [mm]
  rect 0.67x0.3 smd mask+0.108: 1(-0.74,0.5) 2(-0.74,0) 3(-0.74,-0.5) 4(0.74,-0.5) 5(0.74,0) 6(0.74,0.5)
  silkscreen extent -1.58,0.84 -1.22,1.2
VR4 [mm] "Thru-Hole; 3 Leads"
  rect 1.2x1.2 hole 0.7: 1(-2.54,-3.81)
  round 1.2 hole 0.7: 2(0,1.27) 3(2.54,-3.81)
  silkscreen extent -5.08,-6.35 5.08,5.08
"WP154A4 LED" [mil] "RGB LED"
  round 35 hole 25: 1(0,75) 2(0,25) 3(0,-25) 4(0,-75)
  silkscreen extent -105,-105 105,105

## Part data
B1: "SWITCH TACTILE SPST-NO 0.05A 16V Tactile Switch SPST-NO Top Actuated Surface Mount", Color=White, Current Rating="50 mA", Manufacturer="ITT /  C&K Components", Manufacturer Part Number=PTS810SJK250SMTRLFS, Operating Force="2.6 N", Operating Temperature Range="- 40 C to + 85 C", Supplier Part Number 1=CKN10503CT-ND, Voltage Rating DC="16 VDC", Actuator=Oval, Brand="C&K Components", ComponentLink1Description=https://datasheet.ciiva.com/18514/pts810-4mar13-18514061.pdf, ComponentLink1URL=https://datasheet.ciiva.com/18514/pts810-4mar13-18514061.pdf, ComponentLink2Description=https://datasheet.ciiva.com/18514/pts810-4mar13-18514062.pdf, ComponentLink2URL=https://datasheet.ciiva.com/18514/pts810-4mar13-18514062.pdf, ComponentLink3Description=https://datasheet.ciiva.com/18514/pts810-4mar13-18514063.pdf, ComponentLink3URL=https://datasheet.ciiva.com/18514/pts810-4mar13-18514063.pdf, Contact Form=SPST, Contact Plating=Silver, Factory Pack Quantity=2900, Mounting Direction=Straight, Mounting Style=SMD/SMT, Packaging=Reel, Part # Aliases=Y97LT25B5DBFP, Product Category="Tactile Switches", RoHS=Details, Series=PTS810, Stem Height="2.5 mm", Supplier 1=Digi-Key, Switch Function="OFF - (ON)", Termination Style="J Form Lead", Travel="0.15 mm"
C1 C9 C19 C20 C21 C22 C23 C24 C26 C27 C28: "Capacitor", LatestRevisionDate=17-Jul-2002, LatestRevisionNote="Re-released for DXP Platform.", PackageDescription="Radial Cap, Thru-Hole; 2 Leads; 0.3 in Pin Spacing", PackageReference=RAD-0.3, Published=8-Jun-2000, Publisher="Altium Limited"
C4: library part CMP-1035-02311-1, "CAP 10nF 16V ±10% 0603 (1608 Metric) Thickness 1mm SMD", Case-EIA=0603, Case-Metric=1608, Rated Voltage="16 V", Tolerance=±10%, Max Thickness="1 mm", Technology=SMT
C5 C18: library part CMP-1035-02584-1, "CAP 100nF 16V ±10% 0603 (1608 Metric) Thickness 1mm SMD", Case-EIA=0603, Case-Metric=1608, Rated Voltage="16 V", Tolerance=±10%, Max Thickness="1 mm", Technology=SMT
C6: library part CMP-1036-04889-1, "CAP 4.7uF 16V ±10% 0805 (2012 Metric) Thickness 1.45mm SMD", Case-EIA=0805, Case-Metric=2012, Rated Voltage="16 V", Tolerance=±10%, Max Thickness="1.45 mm", Technology=SMT
C7 C8: library part CMP-1035-01048-1, "CAP 47pF 16V ±0.5pF 0603 (1608 Metric) Thickness 1mm SMD", Case-EIA=0603, Case-Metric=1608, Rated Voltage="16 V", Tolerance=±0.5pF, Max Thickness="1 mm", Technology=SMT
C10 C11 C12: library part CMP-1036-04927-1, "CAP 10uF 16V ±10% 0805 (2012 Metric) Thickness 1.45mm SMD", Case-EIA=0805, Case-Metric=2012, Rated Voltage="16 V", Tolerance=±10%, Max Thickness="1.45 mm", Technology=SMT
C13 C14: library part CMP-1036-01106-1, "CAP 18pF 10V ±1% 0805 (2012 Metric) Thickness 0.75mm SMD", Case-EIA=0805, Case-Metric=2012, Rated Voltage="10 V", Tolerance=±1%, Max Thickness="0.75 mm", Technology=SMT
C15: library part CMP-1035-02737-1, "CAP 1uF 16V ±10% 0603 (1608 Metric) Thickness 1mm SMD", Case-EIA=0603, Case-Metric=1608, Rated Voltage="16 V", Tolerance=±10%, Max Thickness="1 mm", Technology=SMT
C25: "4.7 uF 10V 0603", LatestRevisionDate=17-Jul-2002, LatestRevisionNote="Re-released for DXP Platform.", PackageDescription="Radial Cap, Thru-Hole; 2 Leads; 0.3 in Pin Spacing", PackageReference=RAD-0.3, Published=8-Jun-2000, Publisher="Altium Limited"
CLK GND MISO MOSI RESET SCL SD SDA SS SWCLK SWDIO VCC: library part CMP-1672-00008-1, "Test Point, 1 Position SMD, RoHS, Tape and Reel", Package Quantity=1000, ComponentLink1Description="Manufacturer URL", ComponentLink1URL=http://www.keyelco.com/, ComponentLink2Description=Datasheet, ComponentLink2URL=http://www.keyelco.com/product-pdf.cfm?p=1357, Contact Plating=Silver, DatasheetVersion=03/2014, Mount="Surface Mount", Mounting Technology="Surface Mount", PackageDescription="1-Pin Surface Mount Device, Body 3.81 x 2.03 mm", PackageReference=5019, Packaging="Tape and Reel", Pins=1, RoHSCompliant=True
D1: library part CMP-2000-05285-1, "Ultra Low Capacitance Double Rail-to-Rail ESD Protection Diode, 5.5 V, 1 pF, -40 to 85 degC, 4-Pin SOT143B, RoHS, Tape and Reel", Capacitance Value=16pF, ESD Protection Voltage=8KV@ContactDisc, Leakage Current=0.1uA, Manufacturer="NXP Semiconductors", Operating Temperature Classification=Industrial, Operating Temperature Max Deg. C=85C, Operating Temperature Min Deg. C=-40C, Operating Temp Range=-40Cto85C, Package / Case=SOT, Reverse Breakdown Voltage=6V, Reverse Stand-off Voltage=5.5V, Configuration=Quad, Datasheet URL=https://datasheet.ciiva.com/4479/prtr5v0u2x-102853-4479461.pdf, Datasheet Version="Rev. 02, 01/2008", Direction Type=Uni-Directional, Leakage Current (Max)=0.1uA, Manufacturer URL=http://www.nxp.com/, Mounting=SurfaceMount, Mounting Style=SurfaceMount, Number of Elements=1, Package Type=SOT, Packaging=TapeandReel, Pin Count=3+Tab, Polarity=Uni-Directional, Product Depth (mm)=1.4mm, Product Height (mm)=1mm, Product Length (mm)=3mm, Rad Hardened=No, Suppressor Type=DiodeArrays, Working Voltage=5.5V, Working Voltage (Max)=5.5V
D2: library part WP154A4, "RGB LED (THT)", Manufacturer=Kingbright, Manufacturer Part Number=WP154A4SEJ3VBDZGC/CA, Supplier Part Number 1=754-2153-ND, Pricing 1="1 = 2.05000, 10 = 1.81400, 25 = 1.34560, 100 = 1.17000, 250 = 1.05300, 500 = 0.93602, 1000 = 0.80439, 2500 = 0.76051, 5000 = 0.73126 (USD)", Stock 1=3880, Supplier 1=Digi-Key
DS1: library part CMP-2000-05198-1, "Chip LED, Green, 574 nm, 40 pF, -55 to 85 degC, 2-Pin SMD, RoHS, Tape and Reel", Emitting Color=YellowGreen, Forward Current=30mA, Forward Voltage=2.4V, Manufacturer=Lite-On, Operating Temperature Classification=Industrial, Operating Temp Range=-55Cto85C, Package Type=ChipLed, Power Dissipation=75W, Reverse Voltage=5V, Test Current (It)=20mA, Chip Material=AlGaInP, Datasheet URL=http://download.siliconexpert.com/pdfs/2007/08/26/semi_b/manual/lot/ds/ltst-c191kgkt.pdf, Datasheet Version=Jan-07, DELETED=Compliant, Dominant Wave Length=571nm, High Brightness=Yes, Lens Dimensions=1.1X0.8X0.37mm, Luminous Intensity=35mcd, Lum Intensity=35mcd, Main Category=ChipLED, Manufacturer URL=http://www.us.liteon.com/, Mounting=SurfaceMount, Number of Elements=1, Packaging=TapeandReel, Peak Wavelength=574nm, Pin Count=2, Product Depth (mm)=0.8mm, Product Height (mm)=0.55mm, Product Length (mm)=1.6mm, Rad Hardened=No, Shape Type=Rectangular, Type=Uni-Color, Viewing Angle=130deg
FB1 FB2 FB3: library part CMP-0686-00610-2, "Chip Ferrite Bead for Power Lines, 220 Ohm, 2000 mA, -55 to 125 degC, 2 x 1.25 x 1.05 mm SMD, Tape and Reel", DC Resistance="0.045 Ohm Max.", Manufacturer=Murata, Operating Temperature Range="-55 to 125 degC", Rated Current="2000 mA", ComponentLink1Description="Manufacturer URL", ComponentLink1URL=http://www.murata.com/, ComponentLink2Description=Datasheet, ComponentLink2URL=http://www.murata.com/products/catalog/pdf/c31e.pdf, ComponentLink3Description="Package Specification", ComponentLink3URL=http://www.murata.com/products/catalog/pdf/c31e.pdf, DatasheetVersion=08/2013, Impedance (at 100 MHz)="220 Ohm +/- 25%", Mounting Technology="Surface Mount", PackageDescription="2-Pin Chip, Body 2 x 1.25 mm", PackageReference=BLM21_H1050-2, Packing="Tape and Reel", PartNumber=BLM21PG221SN1D
J1: library part CMP-0031-00001-1, "Connector; USBMicro-B,Reverse type, SMT; 5 Position; Right Angle", Operating Temperature="-30 to 85 degC", ComponentLink1Description="Manufacturer URL", ComponentLink1URL=http://www.hirose.com/‎, ComponentLink2Description=Datasheet, ComponentLink2URL=http://www.hirose.co.jp/cataloge_hp/e24200011.pdf, DatasheetVersion=08/2010, Mounting Technology="Surface Mount", PackageDescription="5-Pin USB Micro-B R/A Connector", PackageReference=ZX62R-B-5P, PartNumber=ZX62R-B-5P
LS1: library part "Adafruit 3\" Speaker", "Speaker 3\" Diameter 4 Ohm 3 Watt"
P1 P2: "Header, 2-Pin", LatestRevisionDate=17-Jul-2002, LatestRevisionNote="Re-released for DXP Platform.", Publisher="Altium Limited"
Q1 Q2 Q3: "NPN Bipolar Transistor", Code_JEDEC=TO-226-AA, LatestRevisionDate=17-Jul-2002, LatestRevisionNote="Re-released for DXP Platform.", PackageDescription="TO, Flat Index; 3 In-Line, Axial Leads; Body Dia. 4.8mm; Leads 0.55 x 0.51 mm (max)", PackageReference=TO-226-AA, Published=8-Jun-2000, Publisher="Altium Limited"
R1 R2 R17 R18 R19: library part CMP-1012-00331-1, "27R 0.1W 1% 0603 (1608 Metric)  SMD", Case-EIA=0603, Case-Metric=1608, Power="0.1 W", Tolerance="1 %", Technology=SMT
R3 R5 R20: library part CMP-1012-00510-1, "1K 0.1W 1% 0603 (1608 Metric)  SMD", Case-EIA=0603, Case-Metric=1608, Power="0.1 W", Tolerance="1 %", Technology=SMT
R4 R8 R12 R13 R14: library part CMP-1012-00001-1, "Jumper 0603 (1608 Metric)", Case-EIA=0603, Case-Metric=1608, Power=None, Technology=SMT, Tolerance=None
R6 R9 R10 R11 R15 R16 R33 R37: library part Res1, "Resistor", LatestRevisionDate=17-Jul-2002, LatestRevisionNote="Re-released for DXP Platform.", PackageDescription="Axial Device, Thru-Hole; 2 Leads; 0.3 in Pin Spacing", PackageReference=AXIAL-0.3, Published=8-Jun-2000, Publisher="Altium Limited"
R7: library part CMP-1013-00040-1, "39R 0.125W 5% 0805 (2012 Metric)  SMD", Case-EIA=0805, Case-Metric=2012, Power="0.125 W", Tolerance="5 %", Technology=SMT
R21 R22 R23 R24 R25 R26 R27 R28 R29 R35 R36: "Resistor", LatestRevisionDate=17-Jul-2002, LatestRevisionNote="Re-released for DXP Platform.", PackageDescription="Axial Device, Thru-Hole; 2 Leads; 0.3 in Pin Spacing", PackageReference=AXIAL-0.3, Published=8-Jun-2000, Publisher="Altium Limited"
R30 R32: library part Res1, "Resistor (100)", LatestRevisionDate=17-Jul-2002, LatestRevisionNote="Re-released for DXP Platform.", PackageDescription="Axial Device, Thru-Hole; 2 Leads; 0.3 in Pin Spacing", PackageReference=AXIAL-0.3, Published=8-Jun-2000, Publisher="Altium Limited"
R31: "Potentiometer", LatestRevisionDate=17-Jul-2002, LatestRevisionNote="Re-released for DXP Platform.", PackageDescription="Variable Resistor, Thru-Hole; 3 Leads", PackageReference=VR5, Published=8-Jun-2000, Publisher="Altium Limited", Set Position=0.5, Sim Note="Enter the Resistance value and the set point into parameter fields."
R38: library part FSR-1075-406, "Force Sensing Resistor"
Red1: library part CMP-1426-00010-1, "SMD mono-color Chip LED, WL-SMCW, Super Red", Color="Super Red", Manufacturer="Wuerth Elektronik", ComponentLink1Description="Manufacturer URL", ComponentLink1URL=http://www.we-online.com, ComponentLink2Description=Datasheet, ComponentLink2URL=http://katalog.we-online.com/led/datasheet/150080SS75000.pdf, PackageReference=0805_A, PartNumber=150080SS75000
SD1: library part CMP-2000-05825-1, "Micro SD Card, RA, -25 to 85 degC, 8-Pin SMD, RoHS, Tape and Reel", Current Rating=500mA, Manufacturer=Molex, Package Description="8-Pin Surface Mount Device, Body 11.95 x 11.4 mm, Pitch 1.1 mm", Voltage Rating=10VAC/DC, Brand=Molex, Card Type=microSD, Contact Material=PhosphorBronze, Contact Plating=Gold, Datasheet URL=http://www.molex.com/pdm_docs/sd/1040310811_sd.pdf, Datasheet Version="Rev. E, 04/2006", Height=1.42mm, Housing Material=LiquidCrystalPolymer(LCP), Insertion - Extraction Style=Push-Pull, Length=11.4mm, Manufacturer URL=http://www.molex.com/, Mating Cycles=10000, Mounting Technology=SurfaceMount, Mounting Type=Standard, Number of Contacts=8, Number of Rows=1Row, Orientation=RightAngle, Package Reference=104031-0811, Packaging=Reel, Pitch=1.1mm, Product=CardConnectors, Product Category=MemoryCardConnectors, RoHS=True, Series=104031, Termination Style=SMD
U1: library part CMP-0248-00027-1, "FT234XD USB to BASIC UART IC, -40 to +85 degC, 12-Pin DFN, Pb-Free, Tape and Reel", Manufacturer=FTDI, ComponentLink1Description="Manufacturer URL", ComponentLink1URL=http://www.ftdichip.com/, ComponentLink2Description=Datasheet, ComponentLink2URL=http://www.ftdichip.com/Support/Documents/DataSheets/ICs/DS_FT234XD.pdf, DatasheetVersion="ver 1.1, Feb-2013", PackageDescription="12-Pin Dual Flat No-Lead, 3 x 3 mm Body, 0.45 mm Pitch, Exposed Pad", PackageReference=DFN-12, PackageVersion=Feb-13, PartNumber=FT234XD-R
U2: "CONN HEADER 10POS UNSHD VERT T/H", Current Rating="10 A", Manufacturer="Amphenol / FCI", Supplier Part Number 1=609-3712-ND, Voltage Rating="125 V", Brand=FCI, ComponentLink1Description=https://datasheet.ciiva.com/1433/1079612-1433267.pdf, ComponentLink1URL=https://datasheet.ciiva.com/1433/1079612-1433267.pdf, ComponentLink2Description=https://datasheet.ciiva.com/409/20021111-409158.pdf, ComponentLink2URL=https://datasheet.ciiva.com/409/20021111-409158.pdf, ComponentLink3Description=https://datasheet.ciiva.com/5131/20021111-5131386.pdf, ComponentLink3URL=https://datasheet.ciiva.com/5131/20021111-5131386.pdf, ComponentLink4Description=https://datasheet.ciiva.com/9465/20021111-9465402.pdf, ComponentLink4URL=https://datasheet.ciiva.com/9465/20021111-9465402.pdf, Contact Material=Nickel, Contact Plating=Gold, Factory Pack Quantity=93, Housing Material=Plastic, Manufacturer Part Number=20021111-00010T4LF, Mating Post Length="3.05 mm", Mounting Angle=Vertical, Mounting Style="Through Hole", Number of Positions=10, Number of Positions / Contacts=10, Number of Rows=2, Packaging=Tube, Pitch="1.27 mm", Product Category="Headers & Wire Housings", Product Type=Headers, RoHS=Details, Series=Minitek, Stack Height="2.5 mm", Supplier 1=Digi-Key, Termination Post Length="2.3 mm", Termination Style="Through Hole", Type=Unshrouded
U3: "RF TXRX MODULE WIFI TRACE ANT", Current - Receiving=-, Frequency=2.4GHz, Manufacturer=Atmel, Manufacturer Part Number=ATSAMW25H18-MR510PB, Operating Temperature="-40°C ~ 85°C", Package / Case=Module, Power - Output=17dBm, Supplier Part Number 1=ATSAMW25H18-MR510PB-ND, Voltage - Supply="2.7 V ~ 4.2 V", Antenna Type="Integrated, Trace", Category="RF/IF and RFID", ComponentLink1Description=http://www.atmel.com/devices/ATSAMW25.aspx, ComponentLink1URL=http://www.atmel.com/devices/ATSAMW25.aspx, ComponentLink2Description=http://www.farnell.com/datasheets/1965115.pdf, ComponentLink2URL=http://www.farnell.com/datasheets/1965115.pdf, Current - Transmitting=-, Data Rate=65Mbps, Family="RF Transceiver Modules", Memory Size="256kB Flash, 32kB SRAM", Modulation=-, Mounting Type="Surface Mount", Packaging=Tray, Pricing 1="1=19.14 (USD)", Protocol=802.11b/g/n, RF Family/Standard=WiFi, Sensitivity=-95.5dBm, Serial Interfaces="SPI, UART", Series="Xplained Pro", Stock 1=120, Supplier 1=Digikey
U4: "IC FLASH 8MBIT 100MHZ 8SOIC", Manufacturer="Adesto Technologies", Operating Temperature="-40°C ~ 85°C (TC)", Package=8SOIC, Package / Case="8-SOIC (0.154\", 3.90mm Width)", Supplier Device Package=8-SOIC, Supplier Part Number 1=1265-1166-1-ND, Voltage - Supply="2.7 V ~ 3.6 V", Category="Integrated Circuits (ICs)", ComponentLink1Description=http://www.adestotech.com/wp-content/uploads/doc8715.pdf, ComponentLink1URL=http://www.adestotech.com/wp-content/uploads/doc8715.pdf, ComponentLink2Description=https://datasheet.ciiva.com/14084/doc8715-14084443.pdf, ComponentLink2URL=https://datasheet.ciiva.com/14084/doc8715-14084443.pdf, ComponentLink3Description=https://datasheet.ciiva.com/26910/getdatasheetpartid-730210-26910875.pdf, ComponentLink3URL=https://datasheet.ciiva.com/26910/getdatasheetpartid-730210-26910875.pdf, ComponentLink4Description=https://datasheet.ciiva.com/12251/doc8715-12251468.pdf, ComponentLink4URL=https://datasheet.ciiva.com/12251/doc8715-12251468.pdf, Format - Memory=FLASH, Interface="SPI, RapidS", Manufacturer Part Number=AT25DF081A-SSH-T, Memory Size="8M (4096 pages x 256 bytes)", Memory Type=FLASH, Packaging="Cut Tape (CT)", Part Status=Active, Pricing 1="1=1.18, 10=1.081, 25=1.0516, 50=1.0462, 100=0.9352, 250=0.9324, 500=0.9185, 1000=0.8791 (USD)", Rad Hard=No, RoHS="RoHS Compliant", Speed=100MHz, Stock 1=2550, Supplier 1=Digikey
U5: library part PAM8302A, "2.5W Filterless Class-D Mono Audio Amplifier", Case/Package=SOP, Manufacturer=Diodes, Manufacturer Part Number=PAM8302AADCR, Max Operating Temperature=85°C, Max Output Power=2.5W, Max Supply Voltage=5.5V, Min Operating Temperature=-40°C, Min Supply Voltage=2V, Nominal Supply Current=8mA, Operating Supply Current=4mA, Package Quantity=2500, Power Supply Rejection Ratio (PSRR)=50dB, Supplier Part Number 1=PAM8302AASCRDICT-ND, Voltage Gain=24dB, ComponentLink1Description=http://www.diodes.com/datasheets/PAM8302A.pdf?src-supplier=Avnet, ComponentLink1URL=http://www.diodes.com/datasheets/PAM8302A.pdf?src-supplier=Avnet, ComponentLink2Description=https://www.diodes.com/assets/Datasheets/PAM8302A.pdf?src-supplier=Digi-Key, ComponentLink2URL=https://www.diodes.com/assets/Datasheets/PAM8302A.pdf?src-supplier=Digi-Key, ComponentLink3Description=http://www.mouser.com/ds/2/115/PAM8302A-247351.pdf?src-supplier=Mouser, ComponentLink3URL=http://www.mouser.com/ds/2/115/PAM8302A-247351.pdf?src-supplier=Mouser, Lead Free="Lead Free", Mount="Surface Mount", Number of Channels=1, Number of Pins=8, Output Power=2.5W, Packaging="Tape and Reel", Pricing 1="1 = 0.63000, 10 = 0.54100, 100 = 0.40380, 500 = 0.31724, 1000 = 0.24514 (USD)", Radiation Hardening=No, RoHS=Yes, Stock 1=1058, Supplier 1=Digi-Key, Supply Type=Single, Weight=0.004938oz
U6: library part DS3231, "Extremely Accurate I2C-Integrated RTC/TCXO/Crystal", Case/Package=SOIC, Manufacturer=Maxim, Manufacturer Part Number=DS3231M+, Max Operating Temperature=85°C, Max Supply Voltage=5.5V, Min Operating Temperature=-40°C, Min Supply Voltage=2.3V, Operating Supply Voltage=3.3V, Package Quantity=46, Supplier Part Number 1=DS3231M+-ND, ComponentLink1Description=http://www.mouser.com/ds/2/256/DS3231M-35560.pdf?src-supplier=Mouser, ComponentLink1URL=http://www.mouser.com/ds/2/256/DS3231M-35560.pdf?src-supplier=Mouser, ComponentLink2Description=http://datasheets.maximintegrated.com/en/ds/DS3231M.pdf?src-supplier=Digi-Key, ComponentLink2URL=http://datasheets.maximintegrated.com/en/ds/DS3231M.pdf?src-supplier=Digi-Key, ComponentLink3Description=http://datasheet.iiic.cc/maxim/DS3231M_.pdf?src-supplier=IIIC, ComponentLink3URL=http://datasheet.iiic.cc/maxim/DS3231M_.pdf?src-supplier=IIIC, Date Format=YY-MM-DD-dd, Interface=2-Wire,I2C,Serial, Logic Function=Clock, Mount="Surface Mount", Number of Pins=16, Packaging=Rail/Tube, Pricing 1="1 = 7.98000, 10 = 7.58100, 25 = 6.99000, 50 = 6.64060, 100 = 6.01000, 250 = 5.70952, 1000 = 4.27822 (USD)", Radiation Hardening=No, RoHS=Yes, Stock 1=65, Supplier 1=Digi-Key, Time Format=HH:MM:SS
U9: library part TLV62568ADRL, "This is a buck/boost converter designed by Texas Instruments", Manufacturer="Texas Instruments", Manufacturer Part Number=TLV62568ADRLR, Supplier Part Number 1=296-50407-1-ND, Pricing 1="1 = 1.14000, 10 = 1.01500, 100 = 0.79120, 500 = 0.65364, 1000 = 0.51603 (USD)", Stock 1=2339, Supplier 1=Digi-Key
U10: library part TLE2426, "Rail Splitter IC", Case/Package=SOIC, Manufacturer="Texas Instruments", Max Input Voltage=40V, Max Operating Temperature=125°C, Max Output Current=20mA, Max Output Voltage=20V, Min Operating Temperature=-55°C, Min Output Voltage=2V, Operating Supply Current=400uA, Package Quantity=1, Supplier Part Number 1=296-26774-1-ND, Temperature Coefficient=35ppm/°C, Tolerance=1%, ComponentLink1Description=http://www.ti.com/lit/ds/symlink/tle2426.pdf?src-supplier=Digi-Key, ComponentLink1URL=http://www.ti.com/lit/ds/symlink/tle2426.pdf?src-supplier=Digi-Key, ComponentLink2Description=http://www.ti.com/general/docs/lit/getliterature.tsp?genericPartNumber=TLE2426&&fileType=pdf&src-supplier=Element14, ComponentLink2URL=http://www.ti.com/general/docs/lit/getliterature.tsp?genericPartNumber=TLE2426&&fileType=pdf&src-supplier=Element14, ComponentLink3Description=http://www.ti.com/lit/ds/slos098d/slos098d.pdf?src-supplier=Avnet+Europe, ComponentLink3URL=http://www.ti.com/lit/ds/slos098d/slos098d.pdf?src-supplier=Avnet+Europe, ComponentLink4Description=http://www.farnell.com/datasheets/1362010.pdf?src-supplier=Farnell, ComponentLink4URL=http://www.farnell.com/datasheets/1362010.pdf?src-supplier=Farnell, ComponentLink5Description=http://www.ti.com/general/docs/lit/getliterature.tsp?genericPartNumber=TLE2426&&fileType=pdf&src-supplier=Avnet, ComponentLink5URL=http://www.ti.com/general/docs/lit/getliterature.tsp?genericPartNumber=TLE2426&&fileType=pdf&src-supplier=Avnet, Height=1.58mm, Lead Free="Lead Free", Length=4.9mm, Manufacturer Part Number=TLE2426CDR, Mount="Surface Mount", Number of Pins=8, Output Current=20mA, Output Type=Adjustable, Output Voltage=20V, Packaging="Tape and Reel", Pricing 1="1 = 2.14000, 10 = 1.91900, 100 = 1.54230, 500 = 1.26716, 1000 = 1.04993 (USD)", Radiation Hardening=No, REACH SVHC="No SVHC", Reference Type="Adjustable,Ground Reference (Virtual)", Reference Voltage=20V, RoHS=Yes, Stock 1=17506, Supplier 1=Digi-Key, Weight=0.002677oz, Width=3.91mm
X1: library part CMP-0463-00001-2, "Crystal, 32.768 KHz, -40 to 85 degC, 3.2 x 1.5 x 0.9 mm SMD", Frequency Tolerance="+/-20 ppm", Load Capacitance="12.5 pF", Manufacturer=ITTI, Nominal Frequency=32.768KHz, Operating Temperature="-40 to 85 degC", ComponentLink1Description="Manufacturer URL", ComponentLink1URL=http://www.itti-co.com, Drive Level="1 max. uw", Mounting Technology="Surface Mount", PackageDescription="2-Pin Hand Drawn, Body 3.2 x 1.5mm, Pitch 2.5 mm", PackageReference=14340272-32.768KHz-2, PartNumber=14340272-32.768KHz
L1: Code_IEC=1005, Code_JEITA=0402, LatestRevisionDate=29-May-2009, LatestRevisionNote="IPC-7351 Footprint Added.", PackageDescription="Chip Inductor", PackageReference=0402-A, Published=8-Jun-2000, Publisher="Altium Limited"

## Free pads (board coordinates)
  round 141.73 hole 106.3 paste-102.36: HH1(92.52,2269.69) HH2(2269.68,2269.69) HH3(92.52,92.52) HH4(2269.68,92.52)

## Via types
v1: diameter 20, hole 8, Top Layer to Bottom Layer, tented both sides, 81 vias
v2: diameter 20, hole 8, Top Layer to Bottom Layer, 26 vias
v3: diameter 28, hole 18, Top Layer to Bottom Layer, tented both sides, 4 vias

## Nets (pads, with @x,y where several pads share a name; then routed paths per layer and width w, separated by ;. In a path a pad name is that pad's centre, name@x,y a point inside that pad or via, vN(x,y) a via of type N, cw(c..) or ccw(c..) an arc to the next point about the centre after c; other vN are vias at no path point)
1.65V: C28.2 R38.1 U10.1 | length 856.6
  Top Layer w10: R38.1@1154,197 1174.98,196.38 1350.64,362 1411.98,362 1474.98,425 U10.1 1619,425 1644,400 1644,278 1721.47,200.53 C28.2
ADC: R37.1 R38.2 U3.33 | length 1516.3
  Top Layer w10: v1(1186,258) 1308,380 1308,490 1278,520 v1(1278,564) ; v1(1193,782) 1193,1188.61 1202.39,1198 U3.33 ; R38.2 1240,120 1286.68,73.32 R37.1
  Bottom Layer w10: v1(1186,258) 1186,227 R38.2@1240,173 ; v1(1193,782) 1193,779.29 1191,777.29 1191,614.3 1241.3,564 v1(1278,564)
AT25_CS: R8.2 R9.1 U4.1 | length 192.9
  Top Layer w10: R8.2 1875.57,1559.92 1966.8,1559.92 1966.8,1640.55 R9.1@1954,1653.35
AT25_HOLD: R11.1 U4.7 | length 214.8
  Top Layer w10: R11.1@2100,1653.35 2100,1534 2127,1507 U4.7
AT25_SCK: R12.2 U4.6 | length 505.3
  Top Layer w10: R12.2 1730,1393 1771.19,1434.19 2092.19,1434.19 2115,1457 U4.6
AT25_SI: R13.2 U4.5 | length 410.2
  Top Layer w10: R13.2 2129.05,1368.5 2167.55,1407 U4.5
AT25_SO: R14.2 U4.2 | length 407.2
  Top Layer w10: R14.2 1670,1454 1722,1506 1968.72,1506 U4.2
AT25_WP: R10.1 U4.3 | length 247.8
  Top Layer w10: U4.3 1971.72,1459 2019,1459 2027,1467 R10.1@2027,1653.35
BLUE: D2.3 R26.2 | length 721.3
  Top Layer w10: R26.2 840,261 1057,478 1130,478 1170,438 D2.3
BLUE_PIN: R29.1 U3.14 | length 90.3
  Top Layer w10: U3.14 967,710.61 R29.1@967,621.53
DAC: R31.2 U3.31 | length 644.4
  Top Layer w20: R31.2 1314,1703 1340,1677 1340,1244.91 U3.31
FLASH_MEM_SPI_SS: R8.1 R15.1 SD1.2 SS.1 U3.37 | length 2880.4
  Top Layer w10: U3.37 1013.42,1309.42 1105,1401 1200,1401 1243,1444 v1(1245,1444) ; v1(1705,1564) 1808.5,1564 R8.1 ; SS.1 1927,307 v1(1990,307) ; R15.1@2012,782 2012.53,782.53 R15.1 2064.47,834 v1(2098,834) ; v1(2234,1144) 2284.32,1144 SD1.2
  Bottom Layer w10: v1(1245,1444) 1514,1444 1634,1564 v1(1705,1564) 1854,1564 2233,1185 v1@2233,1145 ; v1(1990,307) 1990,726 v1(2098,834) 2098,902.3 2243,1047.3 2243,1089.8 2234,1098.8 v1(2234,1144) ; v1@2233,1145 v1(2234,1144) ; v1@2233,1145 v1(2234,1144)
GND: B1.3 B1.4 C1.1 C4.1 C5.1 C6.1 C7.1 C8.1 C9.1 C10.1 C11.1 C12.1 C13.2 C14.2 C15.1 C18.1 C20.2 C22.2 C23.1 C24.2 C25.1 C26.1 C27.1 C28.1 D1.1 GND.1 J1.5 J1.6 J1.7 J1.8 J1.9 J1.10 J1.11 Q1.2 Q2.2 Q3.2 R35.1 R37.2 SD1.6 SD1.10 SD1.11 SD1.12 U1.5 U1.13 U2.3 U2.7 U2.9 U3.0 U3.1 U3.10 U3.17 U3.20 U3.32 U3.42 U3.51 U4.4 U5.7 U6.5 U6.6 U6.7 U6.8 U6.9 U6.10 U6.11 U6.12 U6.13 U9.2 U10.2 | length 5669.2
  Top Layer w6: U9.2 129.59,1660.91 129.59,1678.75 136.84,1686 168.78,1686 203.78,1651 v2(219,1651) ; U1.5 U1.13@422.46,1749.43
  Top Layer w7.38: C6.1 75.06,2107.5 C5.1 ; v1(148,1907) 148,1903.59 156.38,1895.2 156.38,1877.03 157.41,1876 C1.1@172.46,1876 ; v1(148,2148) C5.1 ; v1(258,2014) 258.59,2014 284.03,1988.56 C9.1 310.44,1988.56 322.59,1976.41 322.59,1970.77 328.27,1965.09 344.91,1965.09 350,1960 C7.1 ; C4.1 291.94,2107.5 C5.1 ; C7.1@344,1933.44 C7.1@347,1930.44 ; Q1.2 v1(380.68,402) ; U1.13@422.46,1749.43 v1(431.32,1740.57) ; D1.1 491.9,2049 v1(554,2049) ; v1(828,1885) 829,1886 U5.7
  Top Layer w10: C25.1@60.91,1728.57 63,1726.47 C26.1@63,1692.56 ; C25.1@62.44,1728.39 C25.1@63,1728.39 ; C25.1 62.44,1771.44 v2(63,1772) ; C26.1 C26.1@63,1692.56 ; C26.1@68,1687.56 C26.1@63,1692.56 ; v2(219,1651) 257.03,1651 R35.1 ; v1(240,2196) 241,2197 J1.11 ; C4.1 300.44,2161.44 J1.11 ; v1(343.98,73.6) Q2.2 ; v1(344,194) 352,194 Q3.2 ; v1(349,784) 352,781 U3.1 ; U3.51 352,1215.38 350,1213.38 v1(350,1182) 473.06,1058.94 473.06,1055.72 512.43,1016.35 512.43,930.44 599.76,930.44 599.76,1016.35 607.87,1008.24 994.95,1008.24 994.95,893.12 1107.35,893.12 U3.0@1107.35,1008.24 ; J1.5 567.3,2184.2 J1.6 582.06,2197 616.43,2231.37 616.43,2233.34 619.46,2236.37 J1.7 J1.8 J1.9 J1.10 336,2250.15 J1.11 ; C8.1 v1(588.5,1933.44) ; v1(569,578) 631.5,578 C10.1 ; v1(776,647) 777.2,648.2 U3.10 ; v1(776,1177) 777.2,1178.2 U3.42 ; v1(836,2127) 899.28,2127 901.28,2125 C23.1 ; v1(1040.88,1846) 1040.88,1882.32 C20.2 ; U3.17 1108.45,710.89 1108.45,655.55 v1(1109,655) ; v1(1217,618) C11.1 1249.64,627.87 U3.20 ; v1(1248,1311) 1249.64,1309.36 U3.32 ; B1.3 B1.4 1543.69,609.31 v1(1543,610) ; v1(1390.41,135.81) 1390.91,136.31 R37.2 ; C22.2@1443.56,2120.44 1448,2116 v1(1448,2063) ; C12.1 1492,712 v1(1493,711) ; C13.2 1600,1131 v1(1601,1130) ; C14.2 1602,1214 v1(1603,1215) ; U6.13 U6.12 U6.11 U6.10 U6.9 U6.8 U6.7 U6.6 U6.5 v1(2120,2119) ; C28.1@1763.47,143.47 C28.1@1764,144 ; SD1.10 1898,1289.57 v1(1898,1247) ; GND.1 1953,105 1955,103 v2(1955,75) ; U4.4 1970.22,1406.5 2046.5,1406.5 v1(2047,1406) ; C18.1 2122.5,733.5 v1(2125,731) ; C24.2 2163,1802 2172,1793 v1(2194,1793) 2194,1765 2185.5,1756.5 C15.1 ; v2(2201,971) 2202,970 SD1.6 ; v1(2211,1283) 2211.39,1283.39 SD1.11 ; v1(2271,786.09) 2271.31,786.4 SD1.12
  GroundPlane w7.38: v1(828,1885) v1@829,1886
  GroundPlane w10: v1@835.8,2126 835.8,2126.8 v1(836,2127)
  other v1: 470.68,1740.57 431.32,1776 470.68,1776 431.32,1811.43 470.68,1811.43
  other v2: 61,509 159,510 276.4,519 297,632.58 295.46,743 299.46,890 297.8,1028 297.8,1116 295,1228 295,1340 283.4,1443 104,1476.57
GPIO5: P2.2 U3.46 | length 114.5
  Top Layer w10: U3.46 588.22,1276.22 610.68,1298.69 610.68,1336.69 P2.2
GPIO6: P2.1 U3.47 | length 113.3
  Top Layer w10: P2.1 527.2,1330.8 527.2,1252.78 U3.47
GREEN: D2.4 R25.2 | length 637.1
  Top Layer w10: R25.2 734,110 1024,400 1100.37,400 D2.4@1104.69,395.69
GREEN_PIN: R28.1 U3.15 | length 90.6
  Top Layer w10: U3.15 1013.42,623.11 R28.1
MCU_LED: DS1.2 U3.16 | length 100.6
  Top Layer w10: DS1.2@1060.66,610.87 U3.16
MCU_RESET: C12.2 R6.1 R7.1 RESET.1 U2.10 U3.24 | length 1021.7
  Top Layer w10: U3.24 1309.94,877 R6.1 1408,867.47 R7.1 1483.82,809.4 C12.2 1539.88,817.58 1663,940.7 1663,1017 1661.66,1018.34 U2.10@1617,1018.34 ; RESET.1 1510,1281 1532.5,1258.5 1580.38,1258.5 1602.88,1236 1611.7,1236 1624,1223.7 1624,1084 1617,1077 U2.10
MEM_SPI_CLK: CLK.1 R12.1 R19.2 SD1.5 | length 1984.1
  Top Layer w10: R12.1 1730,1142 1689.78,1101.78 1689.78,779.72 R19.2 ; CLK.1 2058,300 2058,385 2045,398 1858.91,398 1689.78,567.13 1689.78,717.78 1691,719 1691,721.54 1718.5,749.03 R19.2 ; SD1.5 2111.31,1013.31 1960,862 1829.5,862 R19.2
MEM_SPI_MISO: MISO.1 R14.1 R18.2 SD1.7 | length 2230.3
  Top Layer w10: v1(1646,1216) 1670,1240 R14.1 ; v1(1790,684) 1774,668 1763,668 1753,678 R18.2 1718.5,709.5 1729.31,720.31 1740.77,720.31 1866.45,846 1977,846 1996,865 2100,865 2149.96,914.96 2273.36,914.96 SD1.7 2327.3,926.7 2336,918 2336,370 2265,299 MISO.1
  Bottom Layer w10: v1(1646,1216) 1686,1176 1686,788 v1(1790,684)
MEM_SPI_MOSI: MOSI.1 R13.1 R17.2 SD1.3 | length 1747.8
  Top Layer w10: v1(1772,839) 1769.29,839 1754.29,824 R17.2 R17.2@1723,828.5 ; R13.1 1790,1124 1723,1057 R17.2@1723,828.5 ; v1(1830,733) 1830,516 1851,495 MOSI.1 ; SD1.3 2273.36,1088.19 1884.19,1088.19 1806.11,1010.11 1806.11,911.61 R17.2@1723,828.5
  Bottom Layer w10: v1(1772,839) 1830,781 v1(1830,733)
NetB1_1: B1.1 B1.2 R7.2 | length 254.1
  Top Layer w10: R7.2 1380.31,706.91 B1.1 B1.2